# Altium PCB Duubel_v3.PcbDoc
Units mm, origin at the board's own origin, x right, y up, seen from the top; angles counter-clockwise.
Board outline 35.25 x 48.7 mm, 4 copper layers (Top Layer, 3v3, GND, Bottom Layer), stack 0.603 mm thick; 51 components, 56 nets, 294 pads, 0 vias.
Unrouted connection lines stored in the file: 1.
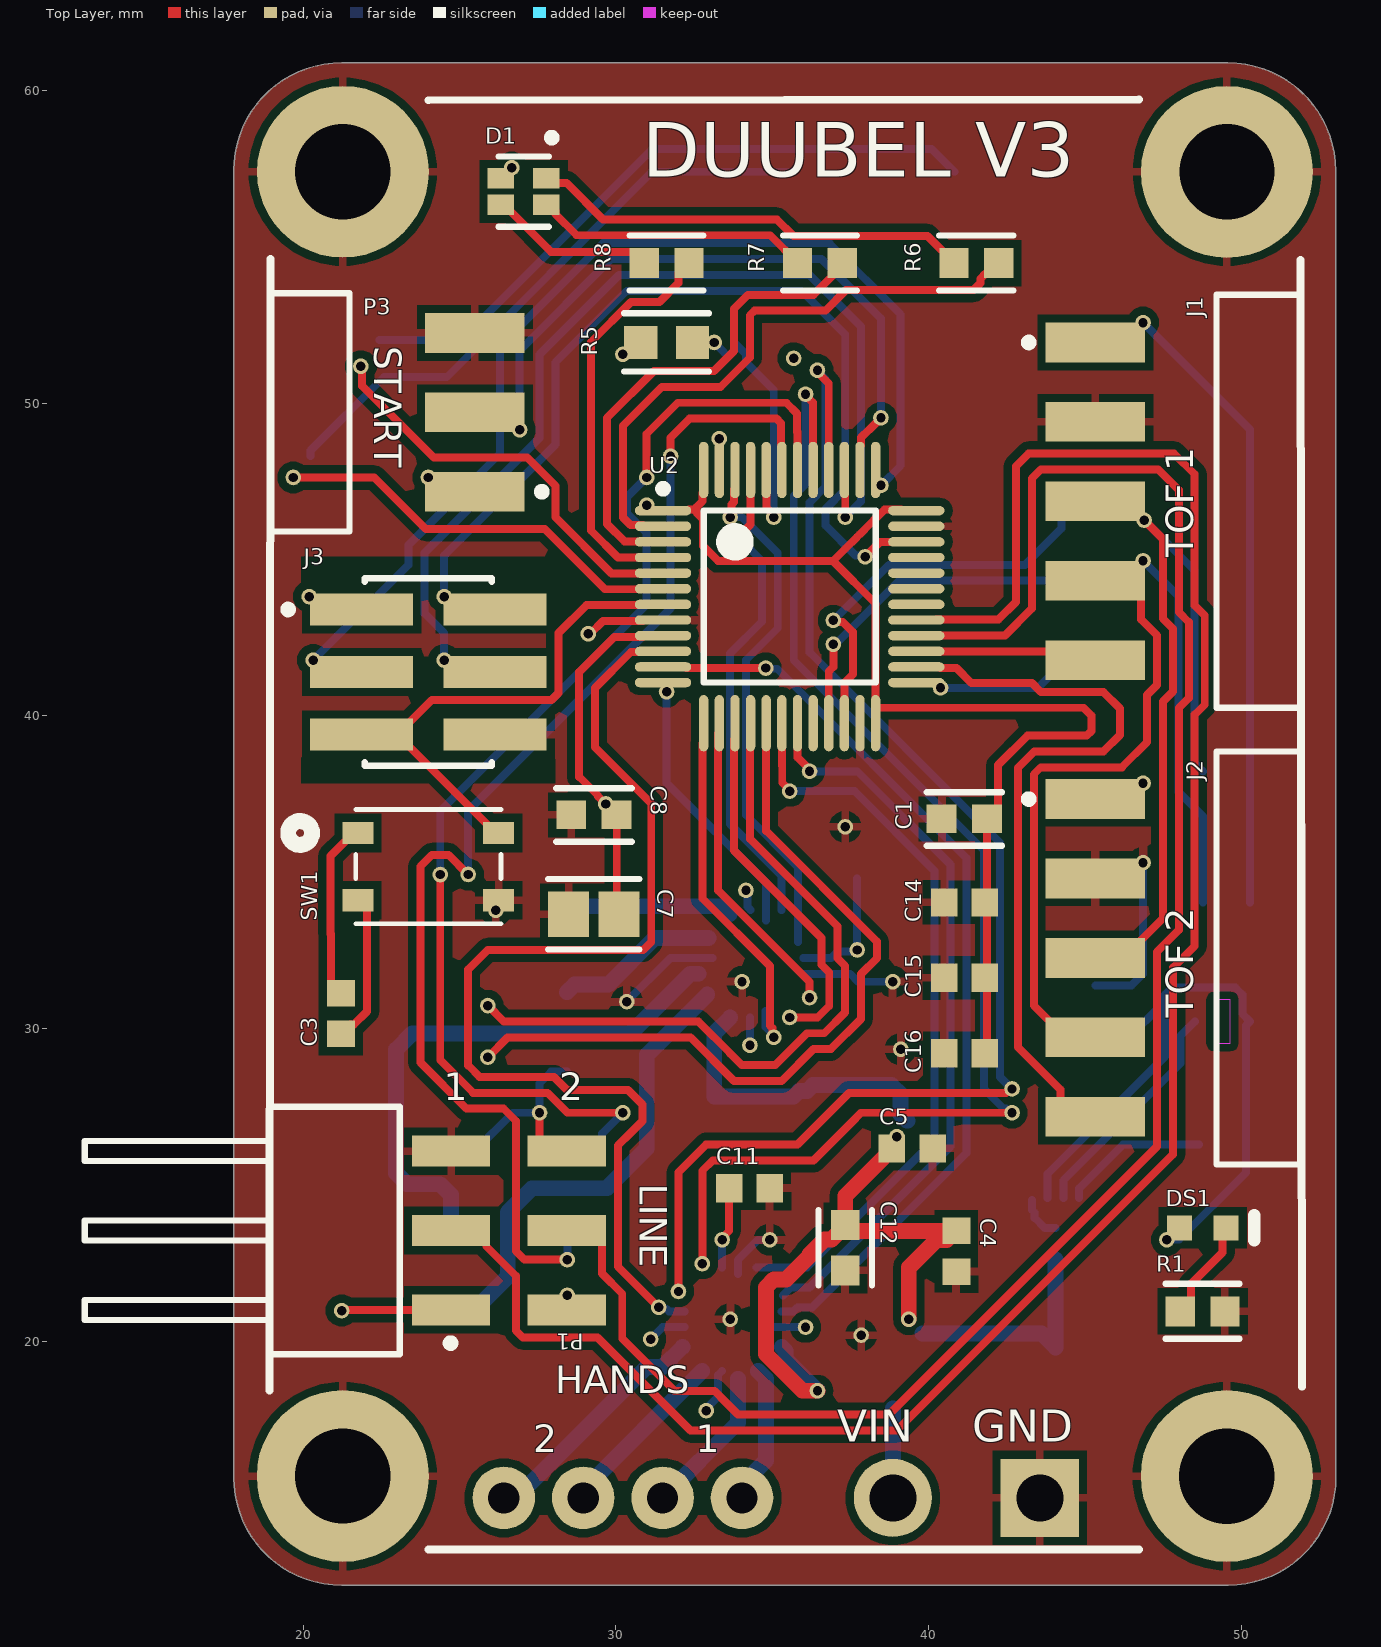
[diagram p0: Top Layer view]
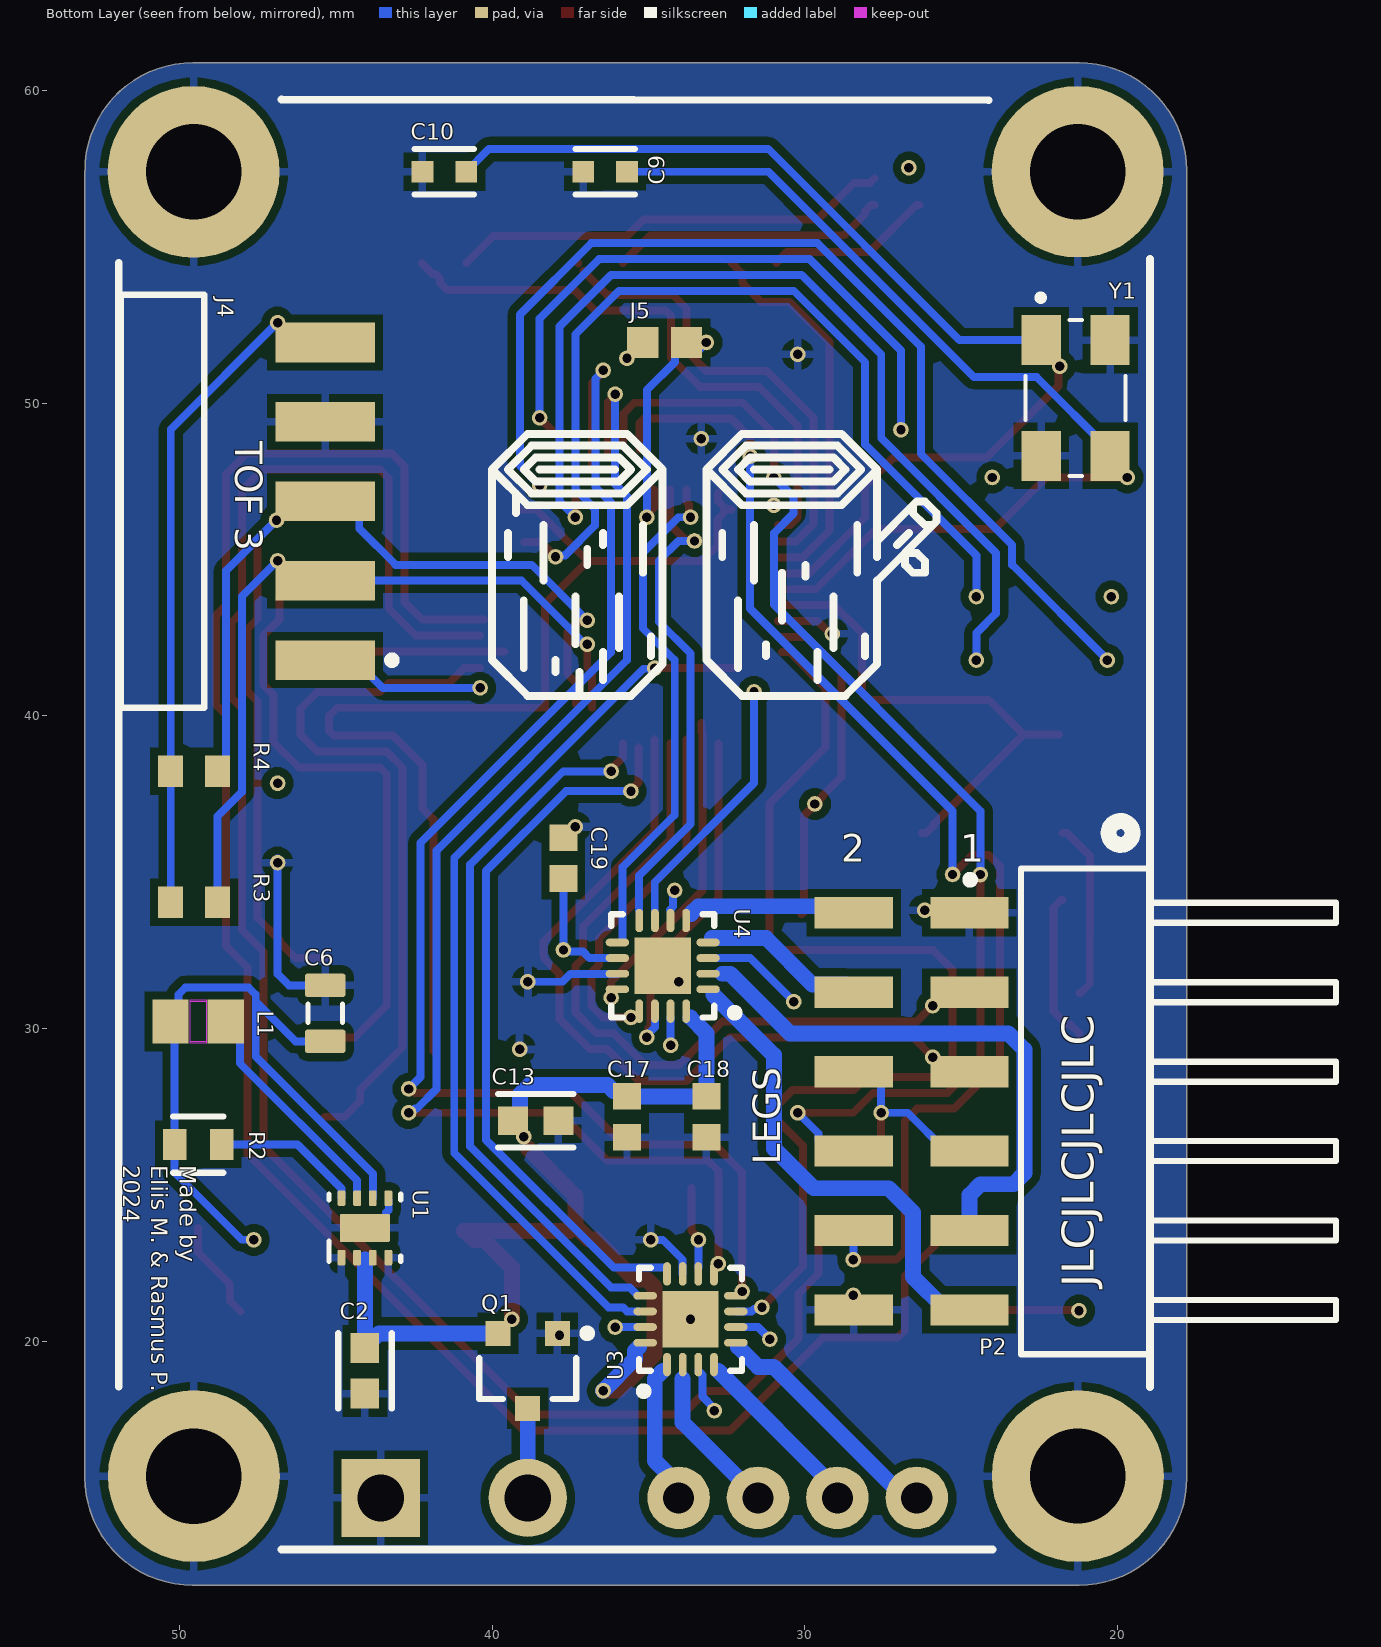
[diagram p1: Bottom Layer view, seen from below]
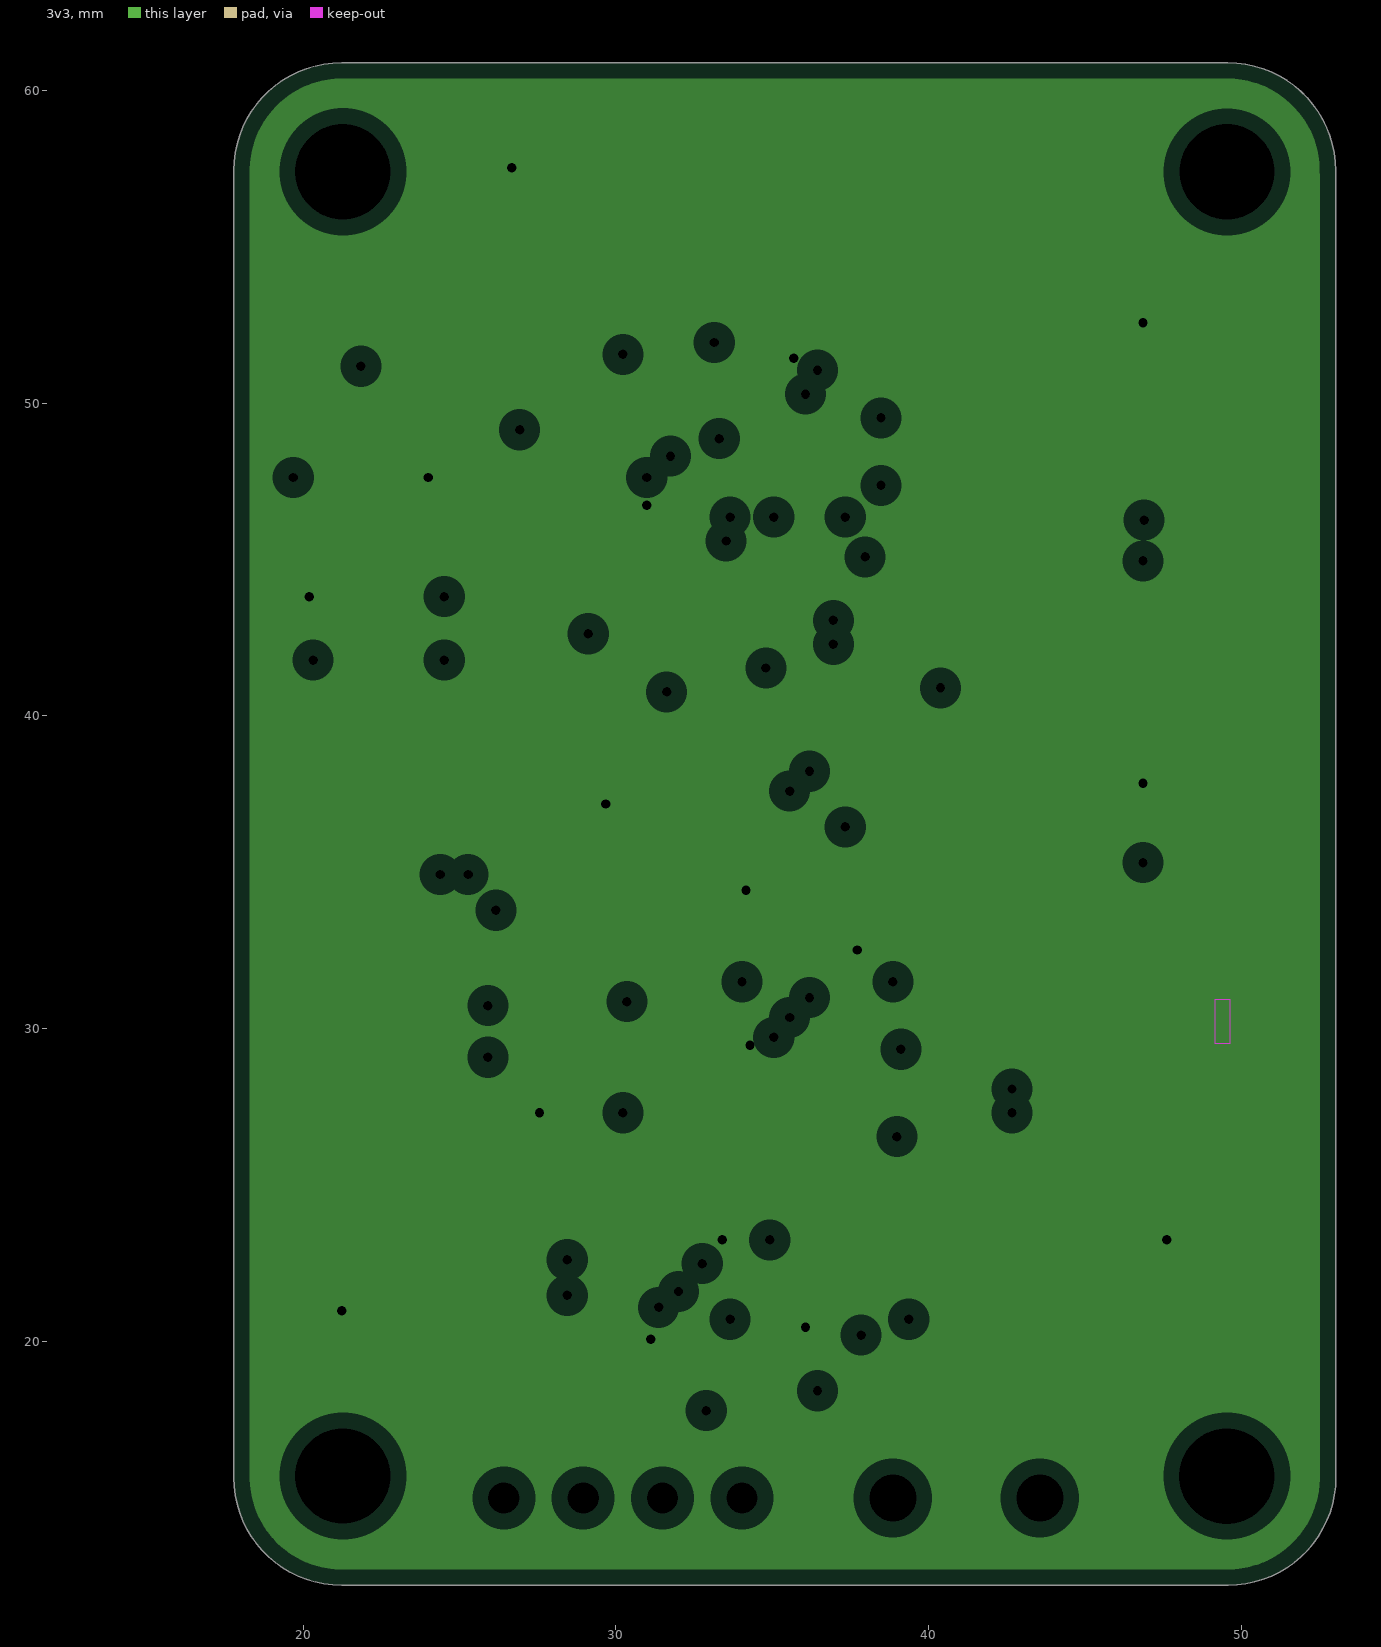
[diagram p2: 3v3, clearances drawn from the general rule]
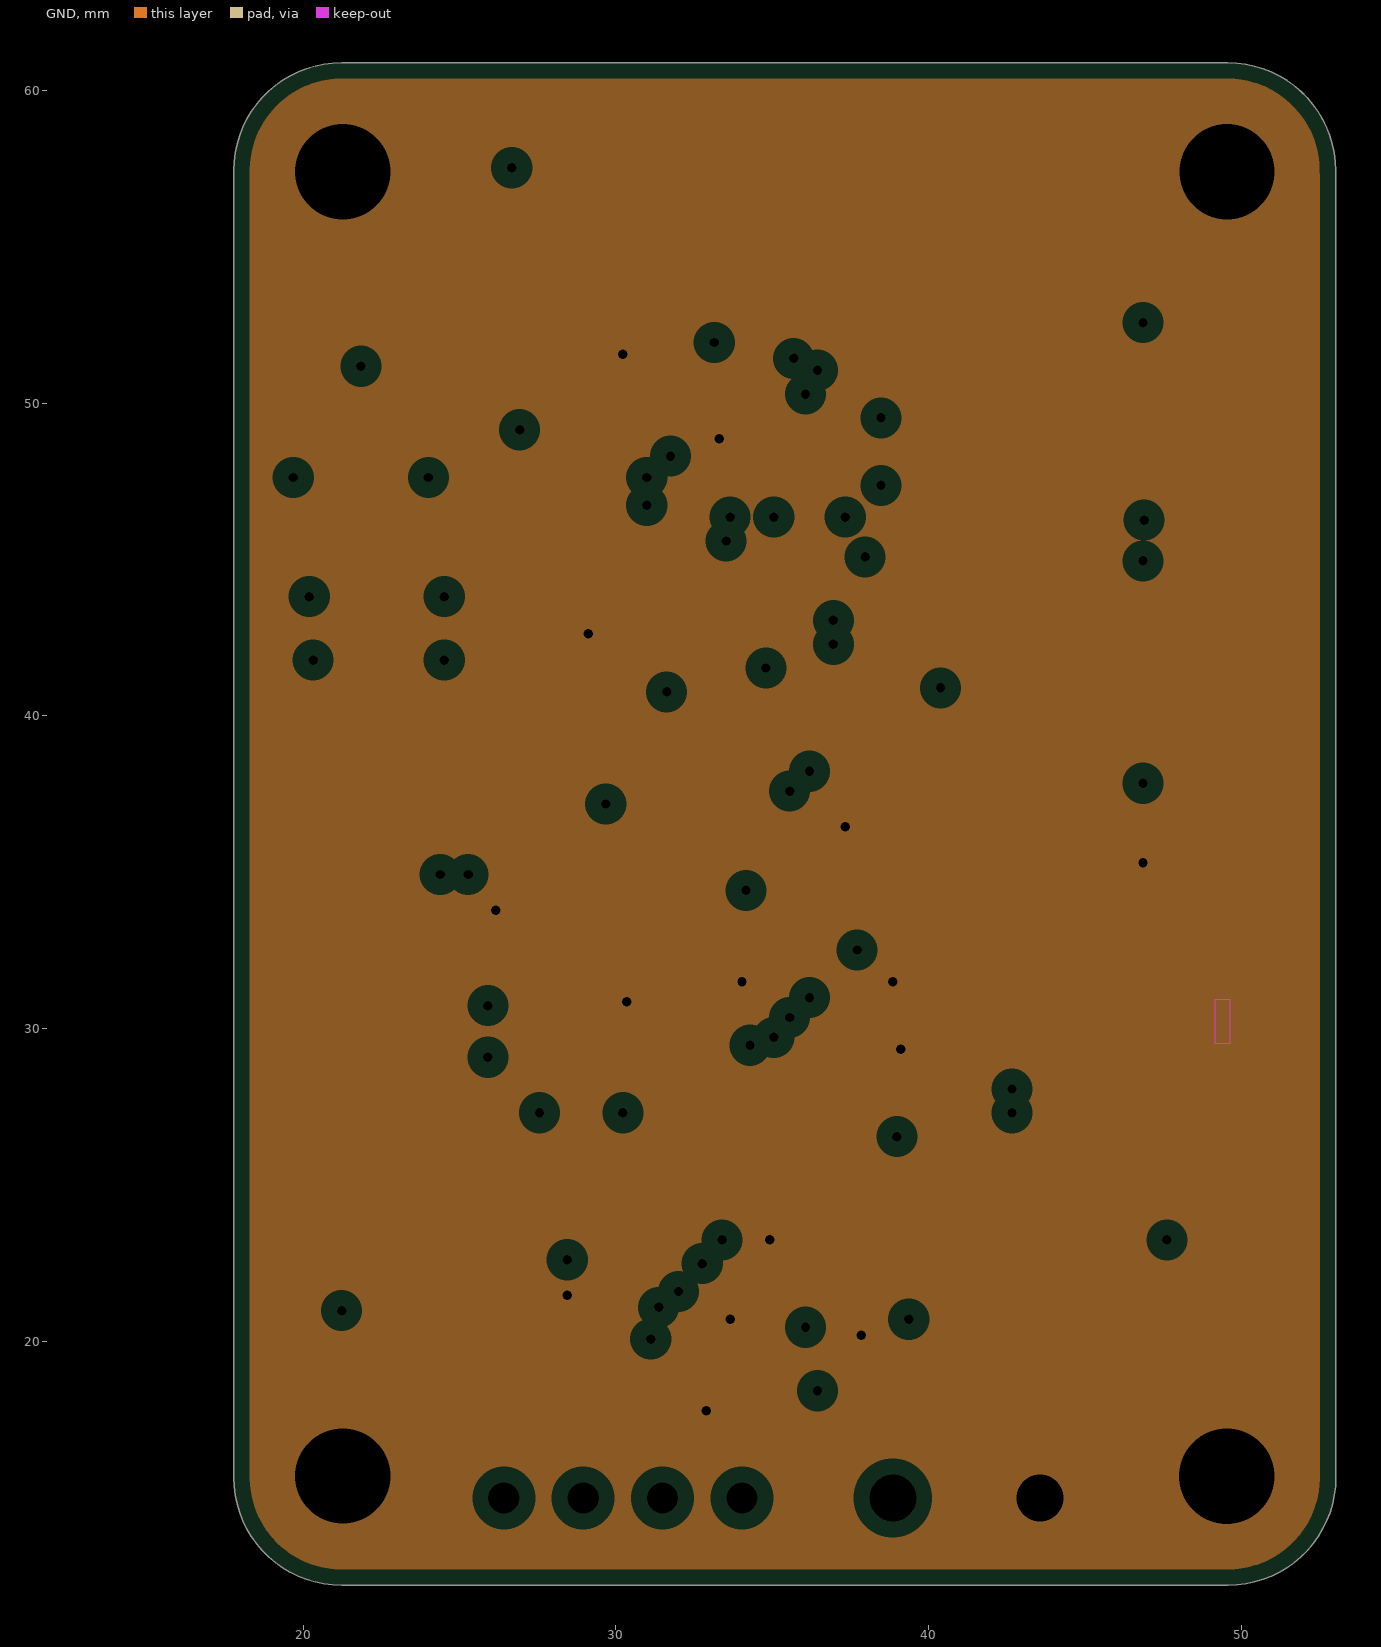
[diagram p3: GND, clearances drawn from the general rule]
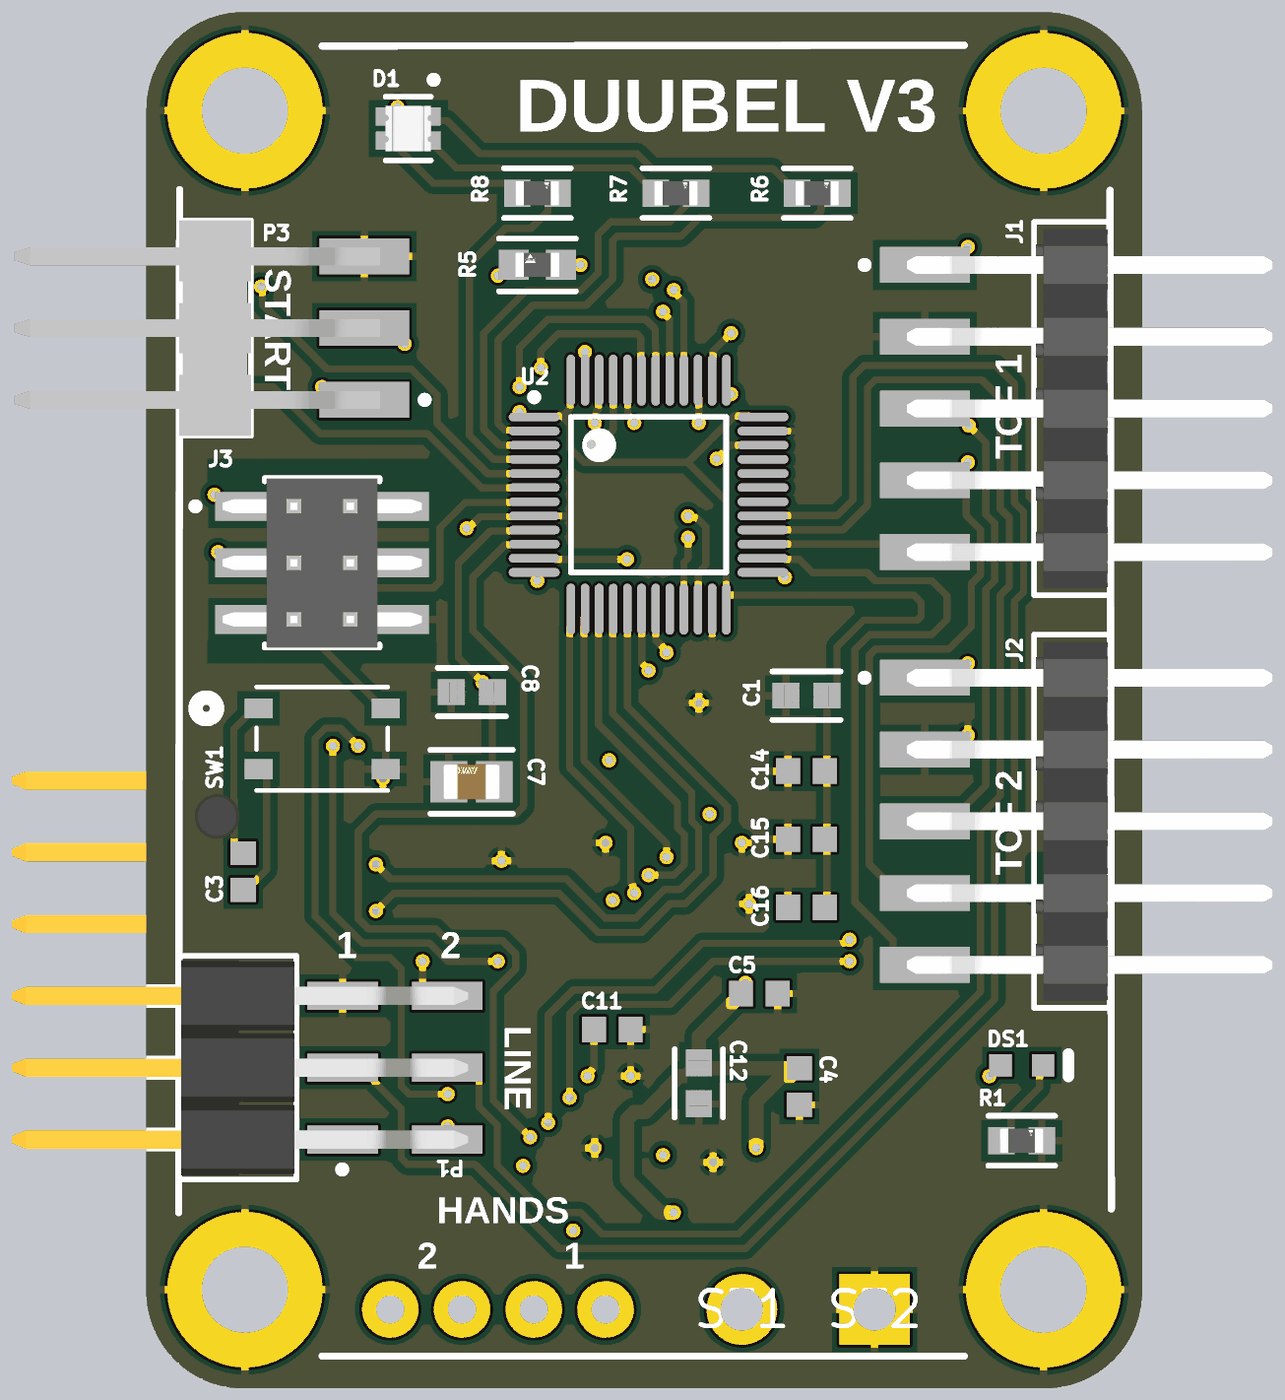
[diagram p4: 3D render of the assembled board from above, using the file's embedded part models]
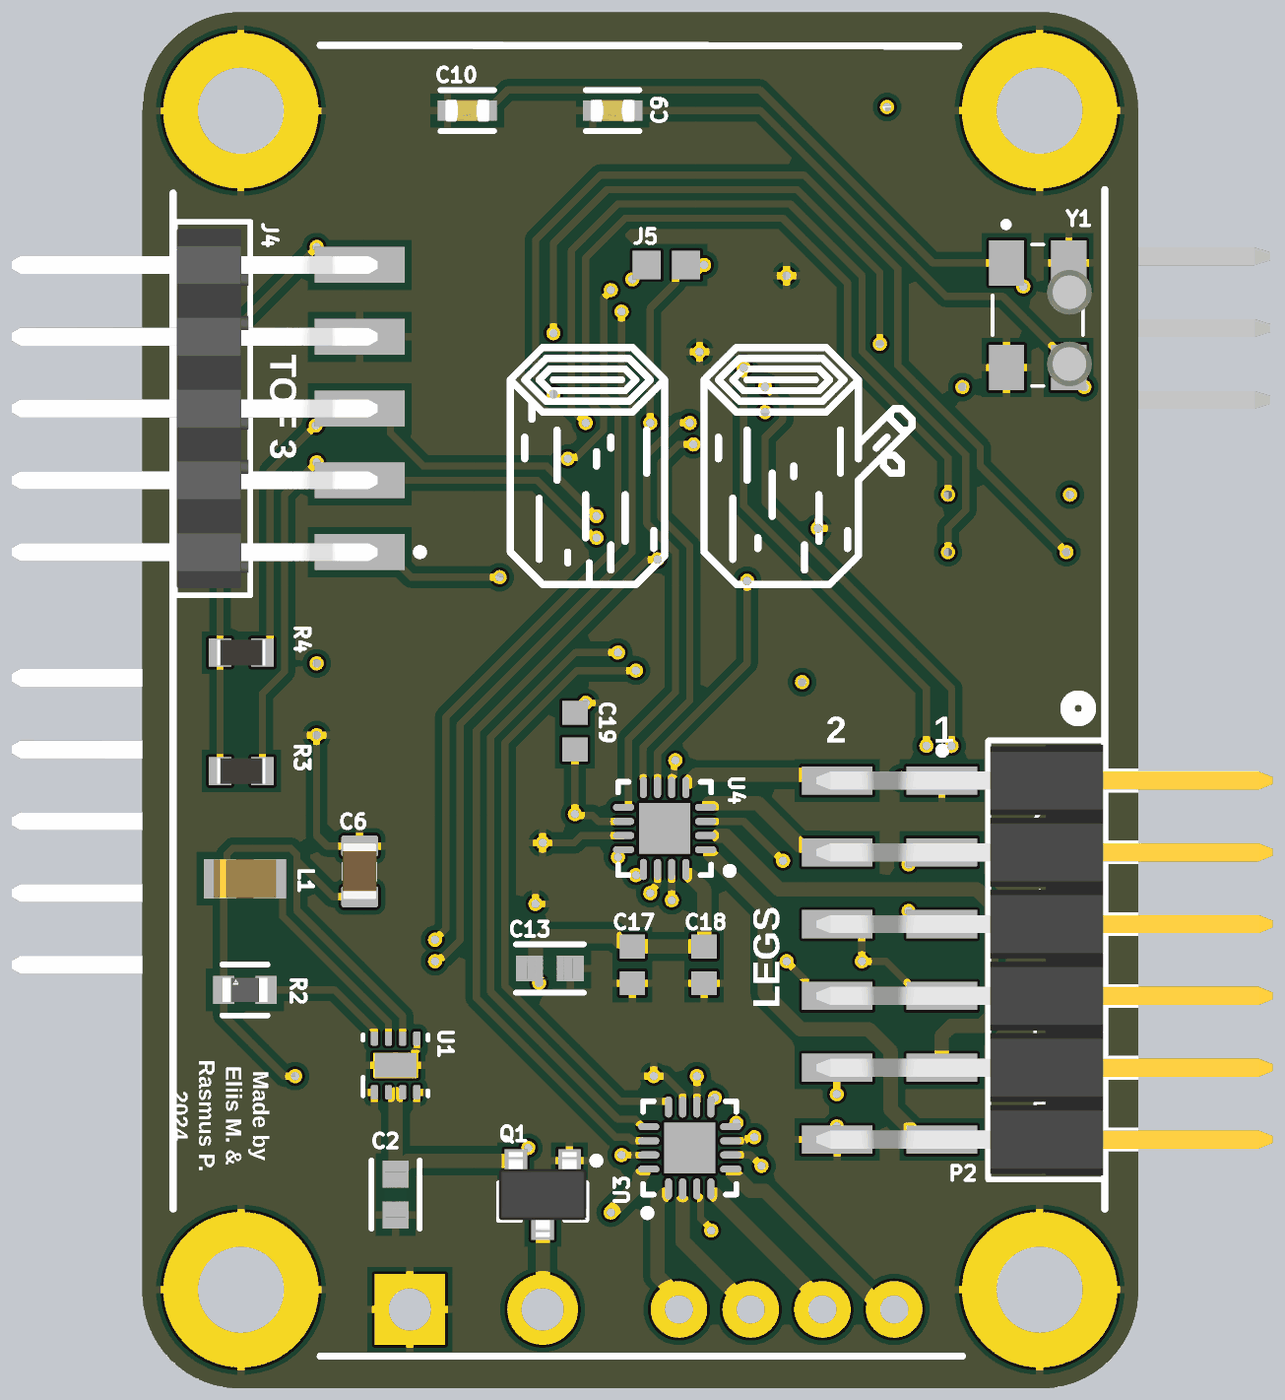
[diagram p5: 3D render of the assembled board from below, using the file's embedded part models]

## Layer stack, top to bottom
Top Solder: solder mask 0.0102, Solder Resist, Dk 3.5
Top Layer: signal copper 0.0356
Dielectric 2: prepreg 0.0711, PP-006, Dk 4.1
3v3: plane copper 0.035, net 3v3
Dielectric 1: dielectric 0.32, FR-4, Dk 4.8
GND: plane copper 0.035, net GND
Dielectric 3: prepreg 0.0711, PP-006, Dk 4.1
Bottom Layer: signal copper 0.0356
Bottom Solder: solder mask 0.0102, Solder Resist, Dk 3.5

## Board outline
17.78,15.639 ccw(c21.227,15.639) 21.227,12.192 49.584,12.192 49.584,12.196 ccw(c49.584,15.643) 53.031,15.643 53.03,15.643 53.03,57.439 53.022,57.439 ccw(c49.575,57.439) 49.575,60.886 49.575,60.889 21.23,60.889 21.23,60.89 ccw(c21.23,57.444) 17.783,57.444 17.78,57.444

## Design rules (kind name [scope] priority, off if disabled: settings)
Clearance [All] p1: gap=0.254 ignorepadtopadclearanceinfootprint=FALSE
PlaneClearance [All] p1: clearance=0.508
PlaneConnect [All] p1: planeconnectstyle=Relief reliefexpansion=0.508 reliefentries=4 reliefconductorwidth=0.254 reliefairgap=0.254
PolygonConnect [All] p1: connectstyle=Relief reliefconductorwidth=0.254 reliefentries=4 polygonreliefangle="90 Angle" airgapwidth=0.254
RoutingVias [All] p1: holewidth=0.711 width=1.27 viastyle="Through Hole" minholewidth=0.711 minwidth=1.27 maxholewidth=0.711 maxwidth=1.27
SolderMaskExpansion [All] p1: expansion=0.102 istentingtop=FALSE
SupplyNets "Schematic Supply Nets" [InNet('GND')] p1: voltage=0.000
Width [All] p1: maxlimit=0.254 minlimit=0.254 preferedwidth=0.254
28 further rules are at their usual default settings.

## Classes and differential pairs
component class Duubel_v3: C1 C2 C3 C4 C5 C6 C7 C8 C9 C10 C11 C12 C13 C14 C15 C16 C17 C18 C19 D1 DS1 J1 J2 J3 J4 J5 L1 P1 P2 P3 Q1 R1 R2 R3 R4 R5 R6 R7 R8 SW1 U1 U2 U3 U4 Y1

## Components (designator, comment, footprint, x,y, rotation, side; value= is the part's Value field where it differs from the comment)
1 "PTH-M1D5X5" PTH-M2D5X5#1 31.496,14.986 r0 top (schematic designator ST7)
2 "PTH-M1D5X5" PTH-M2D5X5#1 26.416,14.986 r180 top (schematic designator ST4)
C1 "CL10A106KP8NNND" FP-CL10-IPC_B 41.148,36.703 r180 top value=10µF
C2 "CL10A106KP8NNND" FP-CL10-IPC_B 44.069,19.05 r270 bottom value=10µF
C3 "0603YC104MAT4A" CAPC1608X90X35LL15T15 21.209,30.48 r90 top value=100nF
C4 "0603YC104MAT4A" CAPC1608X90X35LL15T15 40.894,22.875 r90 top value=100nF
C5 "0603YC104MAT4A" CAPC1608X90X35LL15T15 39.482,26.162 r180 top value=100nF
C6 "Capacitor 22µF +/-40% 16V 0805" CAPC0805(2012)145_L 45.339,30.491 r90 bottom value=22µF
C7 "08053C105K4Z2A" FP-0805-L_2_01_0_2-W_1_25-IPC_B 29.293,33.655 r180 top value=1µF
C8 "CL10B103KB8NFNC" FP-CL10-IPC_B 29.302,36.83 r180 top value=10nF
C9 "0.6p" FP-CGA3E-0_3-0_1-MFG 36.384,57.404 r0 bottom
C10 "0.6p" FP-CGA3E-0_3-0_1-MFG 41.529,57.404 r0 bottom
C11 "0603YC104MAT4A" CAPC1608X90X35LL15T15 34.275,24.892 r180 top value=100nF
C12 "CL10A106KP8NNND" FP-CL10-IPC_B 37.338,22.987 r270 top value=10µF
C13 "CL10A106KP8NNND" FP-CL10-IPC_B 38.608,27.051 r180 bottom value=10µF
C14 "0603YC104MAT4A" CAPC1608X90X35LL15T15 41.148,34.036 r0 top value=100nF
C15 "0603YC104MAT4A" CAPC1608X90X35LL15T15 41.148,31.623 r0 top value=100nF
C16 "0603YC104MAT4A" CAPC1608X90X35LL15T15 41.148,29.21 r0 top value=100nF
C17 "0603YC104MAT4A" CAPC1608X90X35LL15T15 35.687,27.178 r90 bottom value=100nF
C18 "0603YC104MAT4A" CAPC1608X90X35LL15T15 33.147,27.178 r90 bottom value=100nF
C19 "0603YC104MAT4A" CAPC1608X90X35LL15T15 37.719,35.448 r270 bottom value=100nF
D1 "LTST-C19HE1WT" FP-LTST-C19HE1WT-MFG 27.051,56.769 r270 top
DS1 "HSMH-C190" AVAG-HSMX-C190_V 48.774,23.626 r0 top
GND "PTH-M2D5X5" PTH-M2D5X5#2 43.561,14.986 r0 top (schematic designator ST2)
J1 "GEC05SBSN-M89" FP-GEC05SBSN-M89-MFG 50.546,46.863 r270 top
J2 "GEC05SBSN-M89" FP-GEC05SBSN-M89-MFG 50.546,32.258 r270 top
J3 "TMM-103-01-T-D-SM-P-TR" FP-TMM-103-01-T-D-SM-P-TR-MFG 24.003,41.402 r270 top
J4 "GEC05SBSN-M89" FP-GEC05SBSN-M89-MFG 50.546,46.863 r90 bottom
J5 "Solder jumper" "Solder jumper-Footprint-1" 34.798,51.943 r0 bottom
L1 "IHHP0805ZHER2R2M01" IND_IHHP-0805ZH-01_VIS 49.403,30.226 r180 bottom
P1 "610106249121" 610106249121 21.013,23.539 r270 top
P2 "610112249121" 610112249121 21.013,27.349 r90 bottom
P3 "TSM-103-01-S-SH-A" SMTC-TSM-103-01-X-SH-A 20.091,49.709 r90 top
Q1 "AO3401A" AO-SOT-23-3L_V 38.862,19.05 r270 bottom
R1 "RCA06031K00FKEA" FP-RCA0603-e3-IPC_B 48.768,20.955 r0 top value=1k
R2 "CRCW0603100KJNEAHP" FP-CRCW0603-HPe3-MFG 49.403,26.289 r0 bottom value=100k
R3 "Resistor 4k7 +/-1% 0603 100 mW" RESC1608X55X25ML10T15 49.53,34.036 r0 bottom value=4.7k
R4 "Resistor 4k7 +/-1% 0603 100 mW" RESC1608X55X25ML10T15 49.53,38.227 r0 bottom value=4.7k
R5 "MCT06030E1002BP500" FP-MCT0603-IPC_A 31.623,51.943 r180 top value=10k
R6 "RCA06031K00FKEA" FP-RCA0603-e3-IPC_B 41.529,54.483 r0 top value=1k
R7 "RCA06031K00FKEA" FP-RCA0603-e3-IPC_B 36.529,54.483 r0 top value=1k
R8 "RCA06031K00FKEA" FP-RCA0603-e3-IPC_B 31.623,54.483 r0 top value=1k
ST3 "PTH-M1D5X5" PTH-M2D5X5#1 34.036,14.986 r0 top
ST8 "PTH-M1D5X5" PTH-M2D5X5#1 28.956,14.986 r180 top
SW1 "PTS815 SJM 250 SMTR LFS" "SW4_PTS815 SJM 250 SMTR LFS_CNK" 24.003,35.179 r0 top
U1 "TPS62162DSGR" DSG0008A_V 44.069,23.622 r90 bottom
U2 "STM32F101C8T6" STM-LQFP48_N 35.56,43.815 r0 top
U3 "TB6552FTG,8,EL" QFN50P300X300X75_HS-17N 33.655,20.701 r90 bottom
U4 "TB6552FTG,8,EL" QFN50P300X300X75_HS-17N 34.544,32.004 r0 bottom
VIN "PTH-M2D5X5" PTH-M2D5X5#3 38.862,14.986 r0 top (schematic designator ST1)
Y1 "ECS-160-8-30B-CKM" XTAL_ECS-160-8-30B-CKM 21.336,50.165 r270 bottom

## Footprints (in the part's own frame and the unit in brackets; to place one, negate y for a bottom-side part, rotate by r counter-clockwise, add the part's x,y. Pads: shape width x height; smd on the part's side, far side on the other; paste and mask are expansions set on the pad)
610106249121 [mm] "Pin Header, pitch 2.54 mm, SMD, Angled, dual row, 6p"
  rect 1x2.5 smd: 1(2.54,3.72) 2(2.54,7.42) 3(0,3.72) 4(0,7.42) 5(-2.54,3.72) 6(-2.54,7.42)
  silkscreen extent -3.96,-8 3.96,3.83, body extent -3.81,-8 3.81,8.16, height 5.1
610112249121 [mm] "Pin Header, pitch 2.54 mm, SMD, Angled, dual row, 12p"
  rect 1x2.5 smd: 1(6.35,3.72) 2(6.35,7.42) 3(3.81,3.72) 4(3.81,7.42) 5(1.27,3.72) 6(1.27,7.42) 7(-1.27,3.72) 8(-1.27,7.42) 9(-3.81,3.72) 10(-3.81,7.42) 11(-6.35,3.72) 12(-6.35,7.42)
  silkscreen extent -7.77,-8 7.77,3.83, body extent -7.62,-8 7.62,8.16, height 5.1
AO-SOT-23-3L_V [mm] "SOT23, 3-Leads, Body 3.1x1.8mm, Pitch 0.95mm"
  rect 0.8x0.8 smd: 1(-1.2,0.95) 2(-1.2,-0.95) 3(1.2,0)
  silkscreen extent -1.32,-1.55 0.9,2.02, body extent -1.5,-1.55 1.5,1.55, height 1.25
AVAG-HSMX-C190_V [mm] "SMD, 2-Leads, Body 1.6x0.8mm, Height 0.9mm"
  rect 0.8x0.8 smd: 1(-0.75,0) 2(0.75,0)
  silkscreen extent 1.65,-0.4 1.65,0.4, body extent -0.8,-0.4 0.8,0.4, height 0.9
CAPC0805(2012)145_L [mm] "Chip Capacitor, Body 2.0x1.2mm, Height 1.45mm, IPC High Density"
  rrect25% 0.76x1.3 smd: 1(-0.9,0) 2(0.89,0)
  silkscreen extent -0.3,-0.55 0.3,0.55, body extent -1,-0.6 1,0.6, height 1.45
CAPC1608X90X35LL15T15 [mm] "Chip Capacitor, 2-Leads, Body 1.60x0.81mm, IPC High Density"
  rect 0.85x0.9 smd: 1(-0.65,0) 2(0.65,0)
  body extent -0.88,-0.48 0.87,0.48, height 0.9
DSG0008A_V [mm] "SON, 8-Leads, Body 2x2mm, Pitch 0.5mm, Thermal Pad 1.6x0.9mm, TI Recommended"
  rrect40% 0.5x0.25 smd: 1(-0.95,0.75) 2(-0.95,0.25) 3(-0.95,-0.25) 4(-0.95,-0.75) 5(0.95,-0.75) 6(0.95,-0.25) 7(0.95,0.25) 8(0.95,0.75)
  rrect11% 0.9x1.6 smd paste-0.45: 9(0,0)
  silkscreen extent -1.07,-1.15 1.07,1.15, body extent -1.05,-1.05 1.05,1.05, height 0.8
FP-0805-L_2_01_0_2-W_1_25-IPC_B [mm]
  rect 1.305x1.456 smd paste+0 mask+0: 1(-0.806,0) 2(0.806,0)
  silkscreen extent -1.46,-1.13 1.46,1.13, body extent -1,-0.63 1,0.63, height 1.4
FP-CGA3E-0_3-0_1-MFG [mm]
  rect 0.7x0.7 smd paste+0 mask+0: 1(-0.7,0) 2(0.7,0)
  silkscreen extent -0.95,-0.72 0.95,0.72, body extent -0.8,-0.4 0.8,0.4, height 1.1
FP-CL10-IPC_B [mm]
  rect 0.958x0.912 smd paste+0 mask+0: 1(-0.727,0) 2(0.727,0)
  silkscreen extent -1.21,-0.86 1.21,0.86, body extent -0.8,-0.4 0.8,0.4, height 0.9
FP-CRCW0603-HPe3-MFG [mm]
  rect 0.75x1 smd paste+0 mask+0: 1(-0.75,0) 2(0.75,0)
  silkscreen extent -0.8,-0.9 0.8,0.9, body extent -0.8,-0.43 0.8,0.43, height 0.55
FP-GEC05SBSN-M89-MFG [mm]
  rect 1.27x3.18 smd paste+0 mask+0: 1(-5.08,-5.205) 2(-2.54,-5.205) 3(0,-5.205) 4(2.54,-5.205) 5(5.08,-5.205)
  silkscreen extent -6.61,-7.46 6.61,1.34, body extent -6.35,-5.84 6.35,7.11, height 3.69
FP-LTST-C19HE1WT-MFG [mm]
  rect 0.65x0.85 smd paste+0 mask+0: 1(-0.425,0.725) 2(0.425,0.725) 3(0.425,-0.725) 4(-0.425,-0.725)
  silkscreen extent -1.85,-0.8 1.12,1.03, body extent -0.95,-1.25 0.95,1.25, height 0.25
FP-MCT0603-IPC_A [mm]
  rect 1.064x1.062 smd paste+0 mask+0: 1(-0.829,0) 2(0.829,0)
  silkscreen extent -1.36,-0.93 1.36,0.93, body extent -0.77,-0.43 0.77,0.43, height 0.55
FP-RCA0603-e3-IPC_B [mm]
  rect 0.935x0.962 smd paste+0 mask+0: 1(-0.715,0) 2(0.715,0)
  silkscreen extent -1.18,-0.88 1.18,0.88, body extent -1.43,-0.73 1.43,0.73, height 0.25
FP-TMM-103-01-T-D-SM-P-TR-MFG [mm]
  rect 1.02x3.3 smd paste+0 mask+0: 1(-2,-2.135) 2(-2,2.135) 3(0,-2.135) 4(0,2.135) 5(2,-2.135) 6(2,2.135)
  silkscreen extent -3,-4.61 3,2.03, body extent -3.1,-3.89 3.1,3.89, height 0.25
IND_IHHP-0805ZH-01_VIS [mil]
  rect 45.5x55 smd paste+0 mask+0: 1(-34.75,0) 2(34.75,0)
  Top Layer keep-out region: -10,-25.5 -10,25.5 10,25.5 10,-25.5
  Keep-Out Layer region: -10,-27.5 -10,27.5 10,27.5 10,-27.5
  body extent -44,-27 44,27, height 30
PTH-M2D5X5#1 [mm]
  round 2 hole 1: 1(0,0)
PTH-M2D5X5#2 [mm]
  rect 2.5x2.5 hole 1.5: 1(0,0)
PTH-M2D5X5#3 [mm]
  round 2.5 hole 1.5: 1(0,0)
QFN50P300X300X75_HS-17N [mm] "QFN, 16-Leads, Body 3.00x3.00mm, Pitch 0.50mm, Thermal Pad 1.80x1.80mm, IPC Medium Density"
  oval 0.75x0.25 smd: 1(-1.45,0.75) 2(-1.45,0.25) 3(-1.45,-0.25) 4(-1.45,-0.75) 9(1.45,-0.75) 10(1.45,-0.25) 11(1.45,0.25) 12(1.45,0.75)
  oval 0.25x0.75 smd: 5(-0.75,-1.45) 6(-0.25,-1.45) 7(0.25,-1.45) 8(0.75,-1.45) 13(0.75,1.45) 14(0.25,1.45) 15(-0.25,1.45) 16(-0.75,1.45)
  rect 1.8x1.8 smd: 17(0,0)
  silkscreen extent -2.42,-1.65 1.65,1.65, body extent -1.5,-1.5 1.5,1.5, height 0.75
RESC1608X55X25ML10T15 [mm] "Chip Resistor, 2-Leads, Body 1.70x0.90mm, IPC Low Density"
  rect 0.8x1 smd: 1(-0.75,0) 2(0.75,0)
  body extent -0.85,-0.45 0.85,0.45, height 0.55
SMTC-TSM-103-01-X-SH-A [mm] "Terminal Strip Single Surface Mount, 1x3 Pins, Horizontal, 2.54mm Pitch, Male"
  rect 1.27x3.18 smd: 1(-2.54,-5.402) 2(0,-5.402) 3(2.54,-5.402)
  silkscreen extent -3.81,-7.67 3.81,1.15, body extent -3.81,-5.96 3.81,6.99, height 3.05
"Solder jumper-Footprint-1" [mm]
  rect 1x1 smd: 1(-1.016,0) 2(0.381,0)
STM-LQFP48_N [mm] "QFP, 48-Leads, Body 7x7mm, Pitch 0.5mm, IPC Medium Density"
  oval 1.8x0.3 smd: 1(-4.05,2.75) 2(-4.05,2.25) 3(-4.05,1.75) 4(-4.05,1.25) 5(-4.05,0.75) 6(-4.05,0.25) 7(-4.05,-0.25) 8(-4.05,-0.75) 9(-4.05,-1.25) 10(-4.05,-1.75) 11(-4.05,-2.25) 12(-4.05,-2.75) 25(4.05,-2.75) 26(4.05,-2.25) 27(4.05,-1.75) 28(4.05,-1.25) 29(4.05,-0.75) 30(4.05,-0.25) 31(4.05,0.25) 32(4.05,0.75) 33(4.05,1.25) 34(4.05,1.75) 35(4.05,2.25) 36(4.05,2.75)
  oval 0.3x1.8 smd: 13(-2.75,-4.05) 14(-2.25,-4.05) 15(-1.75,-4.05) 16(-1.25,-4.05) 17(-0.75,-4.05) 18(-0.25,-4.05) 19(0.25,-4.05) 20(0.75,-4.05) 21(1.25,-4.05) 22(1.75,-4.05) 23(2.25,-4.05) 24(2.75,-4.05) 37(2.75,4.05) 38(2.25,4.05) 39(1.75,4.05) 40(1.25,4.05) 41(0.75,4.05) 42(0.25,4.05) 43(-0.25,4.05) 44(-0.75,4.05) 45(-1.25,4.05) 46(-1.75,4.05) 47(-2.25,4.05) 48(-2.75,4.05)
  silkscreen extent -4.17,-2.75 2.75,3.57, body extent -3.5,-3.5 3.5,3.5, height 1.6
"SW4_PTS815 SJM 250 SMTR LFS_CNK" [mm]
  rect 0.991x0.711 smd paste+0 mask+0: 1(-2.25,1.075) 2(2.25,1.075) 3(-2.25,-1.075) 4(2.25,-1.075)
  silkscreen extent -4.48,-1.83 2.32,1.83
XTAL_ECS-160-8-30B-CKM [mm]
  rect 1.6x1.25 smd: 1(-1.85,-1.1) 2(1.85,-1.1) 3(1.85,1.1) 4(-1.85,1.1)
  silkscreen extent -3.31,-1.6 2.5,1.6

## Part data
1 2 ST3 ST8: library part CMP-00028-00009-1, "M1 PTH (2.5mm), 5mm pad", Pins=1
C1 C2 C12 C13: library part CMP-001-00093-1, "Ceramic Capacitor, Multilayer, Ceramic, 10V, 10% +Tol, 10% -Tol, X5R, 15% TC, 10uF, Surface Mount, 0603", Capacitor Type=Ceramic, Case/Package=0603, Max Operating Temperature=85°C, Min Operating Temperature=-55°C, Mounting Technology="Surface Mount", Pins=2, RoHS Compliant=Yes
C3 C4 C5 C11 C14 C15 C16 C17 C18 C19: library part CMP-001-00087-1, "Ceramic Capacitor, Multilayer, Ceramic, 16V, 20% +Tol, 20% -Tol, X7R, 15% TC, 0.1uF, Surface Mount, 0603", Capacitor Type=Ceramic, Case/Package=0603, Max Operating Temperature=125°C, Min Operating Temperature=-55°C, Mounting Technology="Surface Mount", Pins=2, RoHS Compliant=Yes
C6: library part CMP-001-00081-4, "Chip Capacitor, 22µF +/-40%, 16V, 0805, Thickness 1.45 mm", Case/Package=0805, Max Operating Temperature=85°C, Min Operating Temperature=-55°C, Tolerance=5%, Voltage Rating=16V, Mounting Technology=SMT, Pins=2
C7: library part CMP-001-00083-1, "Ceramic Capacitor, Multilayer, Ceramic, 25V, 10% +Tol, 10% -Tol, X7R, 15% TC, 1uF, Surface Mount, 0805", Capacitor Type=Ceramic, Case/Package=0805, Max Operating Temperature=125°C, Min Operating Temperature=-55°C, Mounting Technology="Surface Mount", Pins=2, RoHS Compliant=Yes
C8: library part CMP-001-00092-1, "Ceramic Capacitor, Multilayer, Ceramic, 50V, 10% +Tol, 10% -Tol, X7R, 15% TC, 0.01uF, Surface Mount, 0603", Capacitor Type=Ceramic, Case/Package=0603, Max Operating Temperature=125°C, Min Operating Temperature=-55°C, Mounting Technology="Surface Mount", Pins=2, RoHS Compliant=Yes
C9 C10: library part CMP-08246-001317-1, "Cap Ceramic 6pF 50V C0G 0.5pF Pad SMD 0603 +125°C Automotive T/R", Capacitance=6pF, Case Code (Imperial)=0603, Case Code (Metric)=1608, Dielectric=C0G, Max Operating Temperature=125°C, Min Operating Temperature=-55°C, Package Quantity=1, Ratings=AEC-Q200, Voltage Rating=50V, Case/Package=0603, Composition=Ceramic, Depth=0.8mm, Height=0.8mm, Length=1.6mm, Mount="Surface Mount", Packaging="Tape and Reel", REACH SVHC="No SVHC", Termination=SMD/SMT, Thickness=0.035inch, Voltage Rating (DC)=50V, Weight=7.1E-05oz, Width=0.031inch
D1: library part CMP-007-00036-1, "Single Color LED, White Diffused", Forward Current=30mA, Forward Voltage=2.4V, Max Operating Temperature=80°C, Min Operating Temperature=-20°C, RoHS Compliant=Yes
DS1: library part CMP-007-00014-2, "LED Uni-Color Red, 65 mW, 20 mA, -40 to 85 degC, 2-Pin SMD, RoHS, Tape and Reel", Case/Package=0603, Colour=Red, Forward Current=20mA, Forward Voltage=1.8V, Manufacturer=Avago, Max Operating Temperature=85°C, Min Operating Temperature=-40°C, Package Description="2-Pin Surface Mount Device, Body 1.6 x 0.8 mm, Height 0.9 mm", Package Quantity=4000, Package Reference=HSMX-C190, Power=78mW, Datasheet URL=http://docs.avagotech.com/docs/AV02-0551EN, Datasheet Version=Mar-12, Illumination Colour=Red, Lens Style=Diffused, Luminous Intensity=17mcd, Manufacturer URL=http://www.avagotech.com/, Mounting Technology=SM, Nominal Vf=1.8V, Packaging=TapeandReel, Pins=2, RoHS Compliant=True, Viewing Angle=170degrees
GND VIN: library part CMP-00028-00004-2, "M2 PTH (2.5mm), 5mm pad", Pins=1
J1 J2 J4: library part CMP-002-00083-1, "Board Connector, 5 Contact(s), 1 Row(s), Male, Right Angle, Surface Mount Terminal", Connector Type="BOARD CONNECTOR", Mounting Technology=Board, RoHS Compliant=Yes
J3: library part CMP-002-00080-1, "Board Connector, 6 Contact(s), 2 Row(s), Male, Straight, 0.079 inch Pitch, Surface Mount Terminal, Black Insulator", Connector Type="BOARD CONNECTOR", Mounting Technology=Board, RoHS Compliant=Yes
J5: library part CMP-00028-00007-4
L1: library part CMP-006-00021-1, "Power Inductor, 2.2UH, Shielded, 1.8A Rohs Compliant: Yes"
P1: library part CMP-002-00085-2, "Board Connector, 6 Contact(s), 2 Row(s), Male, Right Angle, Surface Mount Terminal", Connector Type="BOARD CONNECTOR", Mounting Technology=Board, RoHS Compliant=Yes
P2: library part CMP-002-00084-2, "Board Connector, 12 Contact(s), 2 Row(s), Male, Right Angle, Surface Mount Terminal", Connector Type="BOARD CONNECTOR", Mounting Technology=Board, RoHS Compliant=Yes
P3: library part CMP-002-00082-2, "Board Connector, 3 Contact(s), 1 Row(s), Male, Right Angle, 0.1 inch Pitch, Surface Mount Terminal, Black Insulator", Connector Type="BOARD CONNECTOR", Mounting Technology=Board, RoHS Compliant=Yes
Q1: library part CMP-013-00036-1, "Small Signal Field-Effect Transistor, 4A I(D), 30V, 1-Element, P-Channel, Silicon, Metal-oxide Semiconductor FET", Max Operating Temperature=150°C, Pins=3, RoHS Compliant=Yes
R1 R6 R7 R8: library part CMP-009-00183-1, "Fixed Resistor, Metal Glaze/thick Film, 0.1W, 1000ohm, 75V, 1% +/-Tol, 100ppm/Cel, Surface Mount, 0603", Case/Package=0603, Max Operating Temperature=155°C, Min Operating Temperature=-55°C, Power=100mW, Tolerance=1%, Mounting Technology="Surface Mount", Pins=2, RoHS Compliant=Yes
R2: library part CMP-009-00191-1, "Fixed Resistor, Metal Glaze/thick Film, 0.33W, 100000ohm, 75V, 5% +/-Tol, 200ppm/Cel, Surface Mount, 0603", Case/Package=0603, Max Operating Temperature=155°C, Min Operating Temperature=-55°C, Power=250mW, Tolerance=5%, Mounting Technology="Surface Mount", Pins=2, RoHS Compliant=Yes
R3 R4: library part CMP-009-00031-5, "Chip Resistor, 4.7 KOhm, +/- 1%, 0.1 W, -55 to 155 degC, 0603 (1608 Metric)", Case/Package=0603, Max Operating Temperature=155°C, Min Operating Temperature=-55°C, Power=100mW, Tolerance=1%, Mounting Technology=SM, Pins=2, RoHS Compliant=True
R5: library part CMP-009-00182-1, "Fixed Resistor, Thin Film, 0.1W, 10000ohm, 75V, 0.1% +/-Tol, 15ppm/Cel, Surface Mount, 0603", Case/Package=0603, Max Operating Temperature=125°C, Min Operating Temperature=-55°C, Power=100mW, Tolerance=0.1%, Mounting Technology="Surface Mount", Pins=2, RoHS Compliant=Yes
SW1: "No Description Available", Mfr_Name="C&K Components", RefDes=RefDes, Type=Type
U1: library part CMP-019-00053-2, "Switching Regulator, Current-mode, 1A, 2250kHz Switching Freq-Max, PDSO8", Case/Package=HVSON, Max Operating Temperature=85°C, Max Supply Voltage=17V, Min Operating Temperature=-40°C, Pins=8, RoHS Compliant=Yes
U2: library part CMP-020-00025-1, "RISC Microcontroller, 32-Bit, FLASH, CORTEX-M3 CPU, 36MHz, CMOS, PQFP48", Case/Package=LFQFP, Clock Frequency=16MHz, Max Operating Temperature=85°C, Max Supply Voltage=3.6V, Min Operating Temperature=-40°C, Min Supply Voltage=2V, Nominal Supply Voltage=3.3V, Pins=48, RoHS Compliant=Yes
U3 U4: library part CMP-00024-00006-2, "Dual-bridge Driver IC For DC Motors"
Y1: "The ECX-53B is a miniature SMD Crystal with a 3.2 x 5 mm footprint. This package is ideal for todays compact wireless applications where board space is critical.", Package=None, Availability=Unavailable, MF="{'manufacturer': u'ECS Inc.'}", MP=ECS-160-8-30B-CKM, Price=None

## Free pads (board coordinates)
  round 5.5 hole 3.048: 11(21.268,15.685) 11(21.27,57.403) 11(49.542,15.683) 11(49.546,57.399)
  round 0.5 hole 0.3: 13(19.685,47.625) 13(20.193,43.815) 13(20.32,41.783) 13(21.231,20.977) 13(21.844,51.181) 13(24.003,47.625) 13(24.384,34.925) 13(24.511,41.783) 13(24.511,43.815) 13(25.275,34.927) 13(25.908,29.083) 13(25.908,30.734) 13(26.162,33.782) 13(26.67,57.531) 13(26.924,49.149) 13(27.559,27.305) 13(28.448,21.463) 13(28.448,22.606) 13(29.118,42.625) 13(29.677,37.182) 13(30.226,27.305) 13(30.226,51.562) 13(30.353,30.861) 13(30.988,46.736) 13(30.988,47.625) 13(31.115,20.066) 13(31.369,21.082) 13(31.623,40.767) 13(31.75,48.306) 13(32.004,21.59) 13(32.766,22.479) 13(32.893,17.78) 13(33.147,51.943) 13(33.306,48.866) 13(33.401,23.241) 13(33.528,45.593) 13(33.655,20.701) 13(33.655,46.355) 13(34.036,31.496) 13(34.163,34.417) 13(34.29,29.464) 13(34.798,41.529) 13(34.925,23.241) 13(35.052,29.718) 13(35.052,46.355) 13(35.56,30.353) 13(35.56,37.592) 13(35.687,51.435) 13(36.068,20.447) 13(36.068,50.292) 13(36.195,30.988) 13(36.195,38.227) 13(36.449,18.415) 13(36.449,51.054) 13(36.957,42.291) 13(36.957,43.053) 13(37.338,36.449) 13(37.338,46.355) 13(37.719,32.512) 13(37.846,20.193) 13(37.973,45.085) 13(38.481,47.371) 13(38.481,49.53) 13(38.862,31.496) 13(38.989,26.543) 13(39.116,29.337) 13(39.37,20.701) 13(40.386,40.894) 13(42.672,27.305) 13(42.672,28.067) 13(46.863,35.306) 13(46.863,37.846) 13(46.863,44.958) 13(46.863,52.578) 13(46.896,46.261) 13(47.625,23.241)

## Nets (pads, with @x,y where several pads share a name; then routed paths per layer and width w, separated by ;. In a path a pad name is that pad's centre, name@x,y a point inside that pad or via, vN(x,y) a via of type N, cw(c..) or ccw(c..) an arc to the next point about the centre after c; other vN are vias at no path point)
3v3: C1.1 C6.1 C7.1 C8.1 C11.2 C14.2 C15.2 C16.2 C19.2 D1.4 DS1.1 J1.1 J2.1 J3.1 J4.5 J5.2 L1.1 P1.1 P1.6 P2.6 P2.7 P3.1 pad.13@20.193,43.815 pad.13@21.231,20.977 pad.13@24.003,47.625 pad.13@26.67,57.531 pad.13@27.559,27.305 pad.13@29.677,37.182 pad.13@30.988,46.736 pad.13@31.115,20.066 pad.13@33.401,23.241 pad.13@34.29,29.464 pad.13@34.163,34.417 pad.13@35.687,51.435 pad.13@36.068,20.447 pad.13@37.719,32.512 pad.13@46.863,37.846 pad.13@46.863,52.578 pad.13@47.625,23.241 R2.2 R3.2 R4.2 U1.6 U2.1 U2.9 U2.24 U2.36 U2.48 U3.6 U3.10 U3.15 U4.6 U4.10 U4.15 | length 109.9
  Top Layer w0.254: pad.13@21.209,20.955 21.231,20.977 21.253,20.999 P1.1 ; pad.13@27.559,27.305 27.559,26.452 27.932,26.079 P1.6 ; C7.1 30.029,33.725 C8.1 30.006,36.83 29.677,37.159 29.677,37.182 29.435,37.424 29.435,37.444 28.829,38.05 28.829,41.402 29.952,42.525 U2.9@30.861,42.525 ; U2.1@32.346,46.596 32.578,46.596 ; U2.48@32.779,47.13 32.779,46.876 32.578,46.675 32.578,46.596 ; pad.13@33.401,23.241 33.401,23.308 33.625,23.532 C11.2 ; 36.945,44.95 38.31,43.585 U2.24@38.31,40.259 ; 37.712,45.716 37.342,45.346 36.954,44.958 33.271,44.958 32.791,45.438 32.791,46.285 32.578,46.498 32.578,46.596 ; 37.799,45.803 38.156,46.16 38.305,46.309 38.592,46.596 39.116,46.596 38.64,46.596 ; U2.24@38.436,40.259 44.958,40.259 45.212,40.005 45.212,39.519 45.063,39.37 43.172,39.37 42.227,38.425 42.227,37.032 41.898,36.703 C1.1 41.875,29.287 C16.2
  Bottom Layer w0.254: P2.7 25.483,26.079 26.709,27.305 27.559,27.305 27.559,28.246 27.932,28.619 P2.6 ; pad.13@31.115,20.066 31.5,20.451 U3.6 ; U3.10@33.397,22.352 33.397,23.237 pad.13@33.401,23.241 ; pad.13@34.163,34.417 34.21,34.37 34.21,33.898 U4.6@34.314,33.794 ; pad.13@34.29,29.464 U4.15@34.29,30.353 ; U3.15@35.105,20.447 pad.13@36.068,20.447 ; U4.10@35.994,32.258 36.89,32.258 37.097,32.465 37.672,32.465 37.719,32.512 C19.2 ; U1.6@43.813,24.572 43.813,25.354 47.561,29.103 47.561,30.861 ; C6.1 46.291,29.591 47.561,30.861 ; pad.13@46.863,52.578 50.28,49.161 R4.2 R3.2 ; pad.13@47.625,23.241 47.627,23.243 48.008,23.243 50.153,25.388 R2.2 50.153,30.093 L1.1 50.038,30.474 50.038,31.082 49.815,31.305 47.785,31.305 47.561,31.082 47.561,30.861
AO1: P2.11 U4.1 | length 15.3
  Bottom Layer w0.508: P2.11 25.483,20.999 26.543,22.059 26.543,24.118 27.317,24.892 29.714,24.892 30.988,26.166 30.988,29.148 32.924,31.084
AO2: P2.9 U4.2 | length 17.8
  Bottom Layer w0.508: P2.9 24.733,24.67 24.384,25.019 23.324,25.019 22.975,25.369 22.975,29.33 23.49,29.845 30.48,29.845 32.385,31.75 32.639,31.75
BLUE: R8.2 U2.4 | length 12.5
  Top Layer w0.254: U2.4@30.988,45.065 30.072,45.065 29.213,45.924 29.213,51.964 30.487,53.238 31.394,53.238 31.998,53.842 31.998,54.142 R8.2
BO1: P2.2 U4.5 | length 5.4
  Bottom Layer w0.508: P2.2 28.643,33.909 33.401,33.909 33.644,33.666
BO2: P2.4 U4.4 | length 5.2
  Bottom Layer w0.508: P2.4 28.679,31.405 29.754,31.405 31.242,32.893 32.963,32.893
BUCK_PG: R2.1 U1.8 | length 4.7
  Bottom Layer w0.254: U1.8 44.819,24.88 46.228,26.289 R2.1
BUCK_SW: L1.2 U1.7 | length 7.4
  Bottom Layer w0.254: U1.7@44.321,24.572 44.321,25.144 48.069,28.892 48.069,29.775 L1.2
ENC_A1: P2.3 pad.13@25.908,30.734 U2.16 | length 22.8
  Top Layer w0.254: pad.13@25.908,30.734 26.416,30.226 32.639,30.226 33.659,29.206 33.659,29.203 34.029,28.833 35.1,28.833 36.116,29.849 36.667,29.849 37.334,30.516 37.334,32.005 37.088,32.251 37.088,33.27 34.29,36.068 U2.16@34.29,39.116
ENC_A2: P2.5 pad.13@25.908,29.083 U2.17 | length 24.2
  Top Layer w0.254: pad.13@25.908,29.083 26.533,29.708 32.395,29.708 33.782,28.321 35.306,28.321 36.326,29.341 36.877,29.341 37.842,30.306 37.842,31.743 38.35,32.251 38.35,32.381 38.354,32.385 38.354,32.778 34.81,36.322 U2.17@34.81,39.243
ENC_B1: P2.10 pad.13@25.275,34.927 pad.13@28.448,22.606 pad.13@31.75,48.306 U2.43 | length 40.2
  Top Layer w0.254: pad.13@25.275,34.927 24.645,35.556 24.123,35.556 23.753,35.186 23.753,28.909 25.226,27.436 26.412,27.436 26.802,27.046 26.802,22.881 27.077,22.606 pad.13@28.448,22.606 ; pad.13@31.75,48.306 31.75,48.895 32.362,49.507 35.137,49.507 35.286,49.358 U2.43@35.286,48.514
  Bottom Layer w0.254: pad.13@25.275,34.927 25.275,36.959 31.75,43.434 pad.13@31.75,48.306 ; P2.10 28.448,23.524 pad.13@28.448,22.606
ENC_B2: P2.8 pad.13@24.384,34.925 pad.13@30.226,27.305 pad.13@30.988,47.625 U2.42 | length 38.6
  Top Layer w0.254: pad.13@24.384,34.925 24.384,28.996 25.436,27.944 27.812,27.944 28.451,27.305 pad.13@30.226,27.305 ; pad.13@30.988,47.625 30.988,49.022 31.981,50.015 35.453,50.015 35.794,49.674 35.794,49.08 ; U2.42@35.814,48.641 35.814,49.08
  Bottom Layer w0.254: pad.13@24.384,34.925 24.384,36.957 30.988,43.561 30.988,45.844 30.357,46.475 30.357,46.997 30.985,47.625 pad.13@30.988,47.625 ; P2.8 29.183,26.079 29.556,26.452 29.556,26.635 pad.13@30.226,27.305
GND: C1.2 C2.2 C4.1 C5.1 C6.2 C7.2 C8.2 C9.2 C10.2 C11.1 C12.2 C13.2 C14.1 C15.1 C16.1 C17.1 C18.1 C19.1 GND.1 J1.2 J2.2 J3.6 J4.4 P1.2 P1.5 P2.1 P2.12 P3.3 pad.11 pad.13@26.162,33.782 pad.13@28.448,21.463 pad.13@29.118,42.625 pad.13@30.226,51.562 pad.13@30.353,30.861 pad.13@32.893,17.78 pad.13@33.306,48.866 pad.13@33.655,20.701 pad.13@34.036,31.496 pad.13@34.925,23.241 pad.13@37.338,36.449 pad.13@37.846,20.193 pad.13@38.862,31.496 pad.13@39.116,29.337 pad.13@46.863,35.306 Q1.1 R1.2 R5.2 SW1.4 U1.1 U1.4 U1.5 U1.9 U2.8 U2.23 U2.35 U2.47 U3.3 U3.11 U3.17 U4.3 U4.11 U4.17 Y1.2 Y1.4 | length 18.3
  Top Layer w0.254: pad.13@29.118,42.625 29.184,42.625 29.592,43.033 U2.8@30.861,43.033
  Bottom Layer w0.254: pad.11@21.192,15.76 pad.11@21.268,15.685 ; pad.13@30.353,30.861 31.746,32.254 U4.3 ; pad.13@32.893,17.78 32.893,17.847 33.274,18.228 33.274,18.923 U3.3@33.401,19.05 ; U3.11 33.905,22.602 34.544,23.241 pad.13@34.925,23.241 ; U4.11@35.994,31.75 37.495,31.75 37.749,31.496 pad.13@38.862,31.496 ; U1.5@43.307,24.511 43.307,24.199 43.396,24.11 43.396,23.945 43.719,23.622 U1.9 ; C6.2 46.494,31.381 46.863,31.75 46.863,35.306 pad.13@46.863,35.433
GREEN: R7.2 U2.3 | length 14.9
  Top Layer w0.254: U2.3@30.861,45.573 30.283,45.573 29.721,46.135 29.721,49.533 31.219,51.031 33.142,51.031 33.778,51.667 33.778,53.021 34.224,53.467 36.322,53.467 R7.2@37.084,54.229 ; R7.2@37.245,54.469 R7.2
HA_IN1: pad.13@35.56,37.592 U2.18 U3.12 | length 23.2
  Top Layer w0.254: U2.18@35.318,38.989 35.318,38.409 35.323,38.404 35.323,37.864 35.56,37.626 pad.13@35.56,37.592
  Bottom Layer w0.254: U3.12@34.5,22.352 36.11,22.352 40.195,26.437 40.195,35.036 37.639,37.592 pad.13@35.56,37.592
HA_IN2: pad.13@36.195,38.227 U2.19 U3.13 | length 23.1
  Top Layer w0.254: U2.19@35.814,39.116 35.814,38.675 36.195,38.294 pad.13@36.195,38.227
  Bottom Layer w0.254: U3.13@35.345,21.463 35.599,21.717 36.193,21.717 40.703,26.227 40.703,35.246 37.722,38.227 pad.13@36.195,38.227
HA_PWM: pad.13@34.798,41.529 U2.11 U3.14 | length 28.9
  Top Layer w0.254: U2.11@32.258,41.529 pad.13@34.798,41.529
  Bottom Layer w0.254: pad.13@34.798,41.529 34.82,41.507 35.161,41.507 41.211,35.457 41.211,26.016 36.273,21.078 35.807,21.078 35.684,20.955 U3.14@35.306,20.955
HB_IN1: pad.13@32.766,22.479 pad.13@36.068,50.292 pad.13@42.672,27.305 U2.41 U3.9 | length 41.8
  Top Layer w0.254: pad.13@32.766,22.479 32.766,25.447 33.1,25.781 36.322,25.781 37.518,26.977 37.518,26.98 37.843,27.305 pad.13@42.672,27.305 ; pad.13@36.068,50.292 36.068,50.254 36.302,50.02 U2.41@36.302,48.387
  Bottom Layer w0.254: pad.13@36.068,50.292 36.068,47.414 35.691,47.037 35.691,41.779 41.783,35.687 41.783,28.064 42.411,27.436 42.474,27.436 42.605,27.305 pad.13@42.672,27.305
HB_IN2: pad.13@32.004,21.59 pad.13@36.449,51.054 pad.13@42.672,28.067 U2.40 U3.8 | length 44.9
  Top Layer w0.254: pad.13@32.004,21.59 32.004,25.403 32.89,26.289 35.814,26.289 37.461,27.936 42.474,27.936 42.605,28.067 pad.13@42.672,28.067 ; pad.13@36.449,51.054 36.449,50.987 36.81,50.626 U2.40
  Bottom Layer w0.254: pad.13@36.449,51.054 36.449,51.032 36.699,50.782 36.699,47.327 36.199,46.827 36.199,42.033 42.291,35.941 42.291,28.448 pad.13@42.672,28.067
HB_PWM: pad.13@31.369,21.082 U2.10 U3.7 | length 34.4
  Top Layer w0.254: U2.10@30.734,42.037 30.481,42.037 29.337,40.893 29.337,38.996 31.132,37.201 31.132,32.769 30.875,32.512 25.905,32.512 25.277,31.884 25.277,28.822 25.647,28.452 28.023,28.452 28.44,28.034 30.389,28.034 30.857,27.566 30.857,27.044 30.487,26.674 30.484,26.674 30.064,26.254 30.064,22.387 pad.13@31.369,21.082
  Bottom Layer w0.254: pad.13@31.369,21.082 31.416,21.035 31.623,21.035 31.707,20.951 U3.7
LA_IN1: pad.13@36.195,30.988 U2.14 U4.12 | length 10
  Top Layer w0.254: U2.14 33.31,39.489 33.274,39.453 33.274,34.414 36.195,31.493 pad.13@36.195,30.988
LA_IN2: pad.13@35.56,30.353 U2.15 U4.13 | length 11.2
  Top Layer w0.254: U2.15@33.782,39.243 33.782,35.69 36.58,32.892 36.58,32.04 36.826,31.794 36.826,30.727 36.456,30.357 35.564,30.357 pad.13@35.56,30.353
LA_PWM: pad.13@35.052,29.718 U2.13 U4.14 | length 11.3
  Top Layer w0.254: U2.13@32.766,39.116 32.766,34.163 34.929,32 34.929,30.092 35.005,30.016 35.005,29.765 pad.13@35.052,29.718
  Bottom Layer w0.254: U4.14 34.794,30.043 35.052,29.785 pad.13@35.052,29.718
LB_IN1: pad.13@33.655,46.355 U2.46 U4.9 | length 16.5
  Top Layer w0.254: pad.13@33.655,46.355 33.702,46.402 33.702,46.756 33.782,46.836 U2.46@33.782,47.244
  Bottom Layer w0.254: pad.13@33.655,46.355 33.657,46.353 34.038,46.353 35.179,45.212 35.179,42.802 34.159,41.782 34.159,36.834 35.825,35.168 U4.9@35.825,32.766
LB_IN2: pad.13@33.528,45.593 U2.45 U4.8 | length 15.8
  Top Layer w0.254: pad.13@33.528,45.593 33.575,45.64 33.832,45.64 34.31,46.118 U2.45@34.31,47.244
  Bottom Layer w0.254: pad.13@33.528,45.593 34.036,45.593 34.671,44.958 34.671,43.013 33.651,41.993 33.651,36.54 35.302,34.889 35.302,34.802 35.306,34.798 U4.8@35.306,33.782
LB_PWM: pad.13@31.623,40.767 U2.12 U4.7 | length 8.6
  Bottom Layer w0.254: pad.13@31.623,40.767 31.623,37.849 34.798,34.674 U4.7@34.798,33.454
LINE1: P1.3 U2.29 | length 66.1
  Top Layer w0.254: P1.3 25.483,23.539 25.856,23.166 25.856,23.039 26.802,22.093 26.802,20.341 27.025,20.118 29.412,20.118 32.385,17.145 38.989,17.145 47.82,25.976 47.82,31.945 48.514,32.639 48.514,40.037 48.836,40.359 48.836,43.207 48.514,43.529 48.514,47.73 47.857,48.387 43.202,48.387 42.799,47.984 42.799,43.644 42.236,43.081 U2.29@40.259,43.081
LINE2: P1.4 U2.28 | length 60.4
  Top Layer w0.254: P1.4 29.183,23.539 29.556,23.166 29.556,22.165 30.205,21.516 30.205,20.084 31.878,18.411 33.154,18.411 33.524,18.041 33.524,18.038 33.909,17.653 38.735,17.653 47.312,26.23 47.312,32.453 48.006,33.147 48.006,40.247 48.328,40.569 48.328,42.997 48.006,43.319 48.006,47.222 47.349,47.879 43.593,47.879 43.307,47.593 43.307,43.434 42.446,42.573 U2.28@40.386,42.573
NetC3_1: C3.1 SW1.3 | length 4.8
  Top Layer w0.254: C3.1 21.507,30.128 21.621,30.128 22.04,30.547 22.04,33.875 21.811,34.104 SW1.3
NetC3_2: C3.2 SW1.1 | length 5.7
  Top Layer w0.254: C3.2 21.184,31.13 20.886,31.428 20.886,33.018 20.877,33.027 20.877,35.517 21.613,36.254 SW1.1
NetC9_1: C9.1 pad.13@19.685,47.625 U2.6 Y1.3 | length 31.8
  Top Layer w0.254: pad.13@19.685,47.625 22.273,47.625 23.924,45.974 27.726,45.974 29.651,44.049 U2.6@30.734,44.049
  Bottom Layer w0.254: Y1.3 20.236,48.49 22.58,50.834 24.589,50.834 31.159,57.404 C9.1
NetC10_1: C10.1 pad.13@21.844,51.181 U2.5 Y1.1 | length 33.8
  Top Layer w0.254: pad.13@21.844,51.181 21.888,51.137 21.888,50.55 24.178,48.26 27.166,48.26 28.067,47.359 28.067,46.352 29.862,44.557 U2.5@30.734,44.557
  Bottom Layer w0.254: Y1.1 25.051,52.015 31.171,58.135 40.098,58.135 C10.1
NetD1_1: D1.1 R6.1 | length 14.2
  Top Layer w0.254: D1.1 27.92,57.05 28.421,57.05 29.591,55.88 35.149,55.88 35.684,55.345 39.965,55.345 40.814,54.497 R6.1
NetD1_2: D1.2 R7.1 | length 8.9
  Top Layer w0.254: D1.2 27.876,56.344 28.074,56.146 28.074,56.046 28.748,55.372 34.939,55.372 35.814,54.497 R7.1
NetD1_3: D1.3 R8.1 | length 5.4
  Top Layer w0.254: D1.3 26.426,56.344 27.933,54.837 30.567,54.837 30.908,54.497 R8.1
NetDS1_2: DS1.2 R1.1 | length 3.2
  Top Layer w0.254: R1.1 48.393,21.296 48.393,21.824 49.403,22.834 DS1.2@49.403,23.622
NetJ5_1: J5.1 pad.13@33.147,51.943 pad.13@35.052,46.355 R5.1 U2.44 | length 7.5
  Top Layer w0.254: U2.44@34.818,47.244 34.818,46.656 35.052,46.422 pad.13@35.052,46.355
  Bottom Layer w0.254: pad.13@33.147,51.943 J5.1@33.464,51.625 ; J5.1 34.155,51.57 34.155,51.316 35.052,50.419 pad.13@35.052,46.355
NetQ1_3: Q1.3 VIN.1 | length 2.9
  Bottom Layer w0.508: VIN.1 Q1.3
NetST3_1: ST3.1 U3.1 | length 4.5
  Bottom Layer w0.508: ST3.1 34.036,15.415 34.798,16.177 34.798,18.796 34.544,19.05
NetST4_1: 2.1 U3.5 | length 7.7
  Bottom Layer w0.508: 2.1 26.806,14.986 30.997,19.177 31.496,19.177 32.131,19.812
NetST7_1: 1.1 U3.2 | length 4.8
  Bottom Layer w0.508: 1.1 33.909,17.399 33.909,18.796
NetST8_1: ST8.1 U3.4 | length 5.6
  Bottom Layer w0.508: ST8.1 28.956,15.24 32.766,19.05
NRST: J3.5 SW1.2 U2.7 | length 16.5
  Top Layer w0.254: J3.5 J3.5@23.008,39.402 ; SW1.2 26.113,36.254 25.885,36.483 25.885,36.525 J3.5@23.008,39.402 ; U2.7@30.988,43.541 29.063,43.541 28.169,42.647 28.169,40.734 27.946,40.511 24.33,40.511 24.329,40.512 24.118,40.512 J3.5@23.008,39.402
RED: R6.2 U2.2 | length 18.7
  Top Layer w0.254: U2.2@30.861,46.101 30.473,46.101 30.229,46.345 30.229,49.279 31.473,50.523 33.352,50.523 34.286,51.456 34.286,52.81 34.435,52.959 36.703,52.959 37.365,53.621 41.439,53.621 41.662,53.844 41.662,53.98 41.811,54.129 41.904,54.129 42.244,54.469 R6.2
SCL: J1.4 J2.4 J4.2 pad.13@36.957,42.291 pad.13@46.863,44.958 R3.1 U2.21 | length 43.5
  Top Layer w0.254: U2.21@36.81,40.259 36.81,41.422 36.957,41.569 pad.13@36.957,42.291 ; J2.4 44.386,29.718 43.37,30.734 43.37,38.131 43.593,38.354 46.184,38.354 46.99,39.16 46.99,40.668 47.312,40.99 47.312,42.576 46.804,43.084 46.804,43.815 46.296,44.323 J1.4
  Bottom Layer w0.254: pad.13@36.957,42.291 37.024,42.291 39.056,44.323 J4.2 ; pad.13@46.863,44.958 47.999,43.822 47.999,37.569 48.78,36.788 R3.1
SDA: J1.3 J2.3 J4.3 pad.13@36.957,43.053 pad.13@46.896,46.261 R4.1 U2.22 | length 40
  Top Layer w0.254: pad.13@36.957,43.053 37.004,43.006 37.258,43.006 37.588,42.676 37.588,41.331 37.318,41.061 U2.22@37.318,40.386 ; J2.3 46.296,32.258 46.804,32.766 46.804,32.834 47.498,33.528 47.498,40.458 47.82,40.78 47.82,42.786 47.498,43.108 47.498,45.659 46.294,46.863 J1.3
  Bottom Layer w0.254: pad.13@36.957,43.053 38.735,44.831 43.085,44.831 44.25,45.996 44.25,46.355 44.758,46.863 J4.3 ; pad.13@46.896,46.261 48.514,44.643 48.514,38.493 R4.1
START: P3.2 pad.13@26.924,49.149 pad.13@38.481,49.53 U2.38 | length 20.4
  Top Layer w0.254: U2.38@37.846,48.641 37.846,48.902 38.09,49.146 38.097,49.146 pad.13@38.481,49.53
  Bottom Layer w0.254: pad.13@26.924,49.149 26.924,51.689 29.845,54.61 36.576,54.61 38.481,52.705 pad.13@38.481,49.53
SWCLK: J3.3 pad.13@20.32,41.783 pad.13@38.481,47.371 U2.37 | length 33.4
  Bottom Layer w0.254: pad.13@20.32,41.783 23.368,44.831 23.368,45.466 26.289,48.387 26.289,51.816 29.591,55.118 36.83,55.118 39.112,52.836 39.112,48.002 pad.13@38.481,47.371
SWDIO: J3.2 pad.13@24.511,43.815 pad.13@37.973,45.085 U2.34 | length 29
  Top Layer w0.254: pad.13@37.973,45.085 38.453,45.565 U2.34@38.989,45.565
  Bottom Layer w0.254: pad.13@24.511,43.815 24.511,45.125 28.067,48.681 28.067,51.308 30.353,53.594 35.941,53.594 37.338,52.197 37.338,47.247 36.707,46.616 36.707,46.094 37.669,45.132 37.926,45.132 pad.13@37.973,45.085
SWO: J3.4 pad.13@24.511,41.783 pad.13@37.338,46.355 U2.39 | length 30.8
  Top Layer w0.254: pad.13@37.338,46.355 U2.39@37.338,47.244
  Bottom Layer w0.254: pad.13@24.511,41.783 24.511,42.647 23.88,43.278 23.88,45.213 27.555,48.888 27.555,51.558 30.099,54.102 36.195,54.102 37.846,52.451 37.846,46.863 pad.13@37.338,46.355
U_RX: U2.31
U_TX: U2.30
VM: C2.1 C4.2 C5.2 C12.1 C13.1 C17.2 C18.2 pad.13@36.449,18.415 pad.13@38.989,26.543 pad.13@39.37,20.701 Q1.2 U1.2 U1.3 U3.16 U4.16 | length 37.1
  Top Layer w0.508: pad.13@36.449,18.415 35.972,18.415 34.802,19.585 34.802,21.721 35.056,21.975 35.449,21.975 36.191,22.717 36.191,22.767 36.672,23.247 36.894,23.247 37.338,23.691 C12.1 ; C5.2 38.832,26.137 37.338,24.643 C12.1 ; pad.13@39.37,20.701 39.37,22.352 40.245,23.227 40.571,23.227 C4.2@40.869,23.525 ; C4.2 C4.2@40.869,23.525 ; C12.1 37.527,23.525 C4.2@40.869,23.525
  Bottom Layer w0.254: C2.1 C2.1@44.069,19.8
  Bottom Layer w0.508: 33.655,30.353 33.147,29.845 C18.2 C17.2 35.858,27.999 36.113,27.999 36.308,28.194 38.812,28.194 39.11,27.896 39.11,27.253 39.312,27.051 C13.1 ; 35.306,19.812 35.433,19.685 35.433,19.431 pad.13@36.449,18.415 ; Q1.2 43.619,20.25 44.069,19.8 44.069,22.606
XSHUT1: J1.5 U2.27 | length 5.8
  Top Layer w0.254: U2.27 45.059,42.065 J1.5
XSHUT2: J2.5 U2.26 | length 23.4
  Top Layer w0.254: U2.26@40.386,41.529 40.894,41.529 41.37,41.053 43.307,41.053 43.593,40.767 45.593,40.767 46.123,40.237 46.123,39.392 45.593,38.862 43.383,38.862 42.862,38.341 42.862,29.401 44.218,28.045 44.218,27.686 44.726,27.178 J2.5
XSHUT3: J4.1 pad.13@40.386,40.894 U2.25 | length 5.3
  Bottom Layer w0.254: pad.13@40.386,40.894 43.497,40.894 44.386,41.783 J4.1
pads on no net: U2.20 U2.32 U2.33

## Polygon pours and split planes (outlines as drawn)
GND on Bottom Layer "BOT_GND" (solid, remove dead copper, pour order 1): 17.78,15.639 ccw(c21.227,15.639) 21.227,12.192 49.584,12.192 49.584,12.196 ccw(c49.584,15.643) 53.031,15.643 53.03,15.643 53.03,57.439 53.022,57.439 ccw(c49.575,57.439) 49.575,60.886 49.575,60.889 21.23,60.889 21.23,60.89 ccw(c21.23,57.444) 17.783,57.444 17.78,57.444
GND on Top Layer "TOP_GND" (solid, remove dead copper, pour order 0): 17.78,15.639 ccw(c21.227,15.639) 21.227,12.192 49.584,12.192 49.584,12.196 ccw(c49.584,15.643) 53.031,15.643 53.03,15.643 53.03,57.439 53.022,57.439 ccw(c49.575,57.439) 49.575,60.886 49.575,60.889 21.23,60.889 21.23,60.89 ccw(c21.23,57.444) 17.783,57.444 17.78,57.444
GND on GND (split plane): 21.23,60.379 49.542,60.379 49.575,60.375 49.591,60.377 49.806,60.368 50.035,60.341 50.261,60.296 50.483,60.234 50.7,60.154 50.909,60.057 51.11,59.944 51.302,59.816 51.483,59.673 51.653,59.517 51.81,59.347 51.952,59.166 52.081,58.974 52.193,58.773 52.29,58.563 52.37,58.347 52.432,58.125 52.477,57.899 52.504,57.67 52.513,57.455 52.511,57.439 52.52,57.356 52.52,15.643 52.522,15.62 52.514,15.412 52.486,15.183 52.441,14.957 52.379,14.735 52.299,14.518 52.202,14.309 52.09,14.108 51.961,13.916 51.819,13.735 51.662,13.565 51.493,13.408 51.311,13.266 51.12,13.137 50.918,13.025 50.709,12.928 50.492,12.848 50.27,12.786 50.044,12.741 49.815,12.713 49.6,12.705 49.584,12.707 49.542,12.702 21.227,12.702 21.211,12.701 20.996,12.709 20.767,12.736 20.541,12.781 20.319,12.844 20.102,12.924 19.893,13.021 19.691,13.133 19.5,13.261 19.318,13.404 19.149,13.561 18.992,13.73 18.849,13.912 18.721,14.103 18.609,14.305 18.512,14.514 18.432,14.731 18.369,14.953 18.324,15.179 18.297,15.408 18.289,15.623 18.29,15.639 18.29,57.413 18.293,57.444 18.292,57.459 18.3,57.674 18.327,57.903 18.372,58.13 18.435,58.352 18.515,58.568 18.612,58.778 18.724,58.979 18.853,59.171 18.995,59.352 19.152,59.521 19.321,59.678 19.503,59.821 19.694,59.949 19.896,60.062 20.105,60.158 20.322,60.238 20.544,60.301 20.77,60.346 20.999,60.373 21.204,60.381
3v3 on 3v3 (split plane): 21.23,60.379 49.542,60.379 49.575,60.375 49.591,60.377 49.806,60.368 50.035,60.341 50.261,60.296 50.483,60.234 50.7,60.154 50.909,60.057 51.11,59.944 51.302,59.816 51.483,59.673 51.653,59.517 51.81,59.347 51.952,59.166 52.081,58.974 52.193,58.773 52.29,58.563 52.37,58.347 52.432,58.125 52.477,57.899 52.504,57.67 52.513,57.455 52.511,57.439 52.52,57.356 52.52,15.643 52.522,15.62 52.514,15.412 52.486,15.183 52.441,14.957 52.379,14.735 52.299,14.518 52.202,14.309 52.09,14.108 51.961,13.916 51.819,13.735 51.662,13.565 51.493,13.408 51.311,13.266 51.12,13.137 50.918,13.025 50.709,12.928 50.492,12.848 50.27,12.786 50.044,12.741 49.815,12.713 49.6,12.705 49.584,12.707 49.542,12.702 21.227,12.702 21.211,12.701 20.996,12.709 20.767,12.736 20.541,12.781 20.319,12.844 20.102,12.924 19.893,13.021 19.691,13.133 19.5,13.261 19.318,13.404 19.149,13.561 18.992,13.73 18.849,13.912 18.721,14.103 18.609,14.305 18.512,14.514 18.432,14.731 18.369,14.953 18.324,15.179 18.297,15.408 18.289,15.623 18.29,15.639 18.29,57.413 18.293,57.444 18.292,57.459 18.3,57.674 18.327,57.903 18.372,58.13 18.435,58.352 18.515,58.568 18.612,58.778 18.724,58.979 18.853,59.171 18.995,59.352 19.152,59.521 19.321,59.678 19.503,59.821 19.694,59.949 19.896,60.062 20.105,60.158 20.322,60.238 20.544,60.301 20.77,60.346 20.999,60.373 21.204,60.381

## Other copper
Top Layer:
  pour cut-out: 28.042,44.166 28.067,44.191 28.067,45.085 19.939,45.085 19.939,44.191
  pour cut-out: 19.939,38.663 19.939,37.846 28.067,37.846 28.067,38.613 28.042,38.638
  pour cut-out: 19.964,38.638 19.939,38.663

## Silkscreen, mask and mechanical layers (free items; w line width, h text height)
Top Overlay:
  lines w0.254: 18.923,18.415 18.958,54.606 ; 24.003,13.335 46.736,13.335 ; 24.003,59.69 46.736,59.717 ; 51.896,54.584 51.943,18.542
  text "DUUBEL V3" at 30.853,56.67 h3
  text "START" at 21.981,51.824 h1.5 r270
  text "TOF 1" at 48.758,45.077 h1.5 r90
  text "TOF 2" at 48.758,30.345 h1.5 r90
  text "1" at 24.503,27.424 h1.5
  text "2" at 28.186,27.424 h1.5
  text "LINE" at 30.472,25.027 h1.5 r270
  text "HANDS" at 28.059,18.044 h1.5
Bottom Overlay:
  lines w0.254: 18.958,54.606 18.96,18.54 ; 24.003,13.335 46.736,13.335 ; 24.13,59.69 46.736,59.717 ; 26.67,45.847 27.051,45.466 ; 27.686,45.085 27.686,47.879 ; 27.686,45.593 26.543,46.736 ; 28.067,41.91 28.067,42.545 ; 28.321,44.577 28.321,46.101 ; 29.083,42.164 29.083,43.815 ; 29.21,47.879 31.623,47.879 ; 29.591,41.148 29.591,42.037 ; 29.972,44.45 29.972,44.831 ; 30.734,43.053 30.734,44.577 ; 31.242,41.91 31.242,42.291 ; 31.623,44.323 31.623,46.101 ; 32.131,41.529 32.131,43.688 ; 32.639,45.085 32.639,45.847 ; 34.925,41.91 34.925,42.545 ; 35.179,44.577 35.179,46.101 ; 35.941,42.164 35.941,43.815 ; 36.068,47.879 38.481,47.879 ; 36.449,41.148 36.449,42.037 ; 36.449,45.466 36.449,45.847 ; 36.957,44.831 36.957,45.339 ; 37.211,40.64 37.211,41.402 ; 37.338,42.291 37.338,43.815 ; 37.973,41.402 37.973,41.783 ; 38.354,44.323 38.354,46.101 ; 38.989,41.529 38.989,43.688 ; 39.243,46.482 39.243,47.117 ; 39.497,45.085 39.497,45.847 ; 51.943,18.542 51.943,54.483 ; 25.908,46.101 25.781,46.228 25.781,46.482 26.162,46.863 26.416,46.863 26.543,46.736 ; 25.908,46.101 27.686,44.323 27.686,41.656 28.702,40.64 32.004,40.64 33.147,41.783 33.147,47.879 ; 25.908,46.101 26.162,46.101 26.543,46.482 26.543,46.736 ; 27.686,47.879 28.829,49.022 32.004,49.022 33.147,47.879 ; 27.686,47.879 28.829,46.736 32.004,46.736 33.147,47.879 ; 34.544,47.879 35.687,46.736 38.862,46.736 40.005,47.879 ; 34.544,47.879 35.687,49.022 38.862,49.022 40.005,47.879 ; 34.544,47.879 34.544,41.656 35.56,40.64 38.862,40.64 40.005,41.783 40.005,47.879 ; 26.162,44.577 26.543,44.577 26.797,44.831 26.797,45.212 26.416,45.212 26.162,44.958 26.162,44.577 ; 28.194,47.879 28.956,48.641 29.083,48.641 31.877,48.641 32.639,47.879 31.877,47.117 28.956,47.117 28.194,47.879 ; 28.702,47.879 29.083,48.26 31.75,48.26 32.131,47.879 31.75,47.498 29.083,47.498 28.702,47.879 ; 35.052,47.879 35.814,47.117 38.735,47.117 39.497,47.879 38.735,48.641 35.941,48.641 35.814,48.641 35.052,47.879 ; 35.56,47.879 35.941,47.498 38.608,47.498 38.989,47.879 38.608,48.26 35.941,48.26 35.56,47.879
  text "TOF 3" at 48.504,48.776 h1.5 r90
  text "1" at 25.027,35.044 h1.5
  text "2" at 28.837,35.044 h1.5
  text "LEGS" at 30.49,25.646 h1.5 r270
  text "Made by / Eliis M. & Rasmus P. / 2024" at 51.974,25.63 h0.9 r90
  text "JLCJLCJLCJLC" at 20.423,21.723 h1.75 r270
Mechanical 1:
  lines w0.254: 17.78,57.444 17.78,15.639 ccw(c21.227,15.639) 21.227,12.192 49.584,12.192 ; 17.783,57.444 cw(c21.23,57.444) 21.23,60.89 ; 21.23,60.889 49.575,60.889 ; 49.575,60.886 cw(c49.575,57.439) 53.022,57.439 ; 49.584,12.196 ccw(c49.584,15.643) 53.031,15.643 ; 53.03,15.643 53.03,57.439